# Altium PCB Master.PcbDoc (part 1 of 4)
Units mm, origin at the board's own origin, x right, y up, seen from the top; angles counter-clockwise.
Board outline 150 x 100 mm, 4 copper layers (Top Layer, GND-Layer, PWR-Layer, Bottom Layer), stack 1.586 mm thick; 231 components, 152 nets, 715 pads, 841 vias.
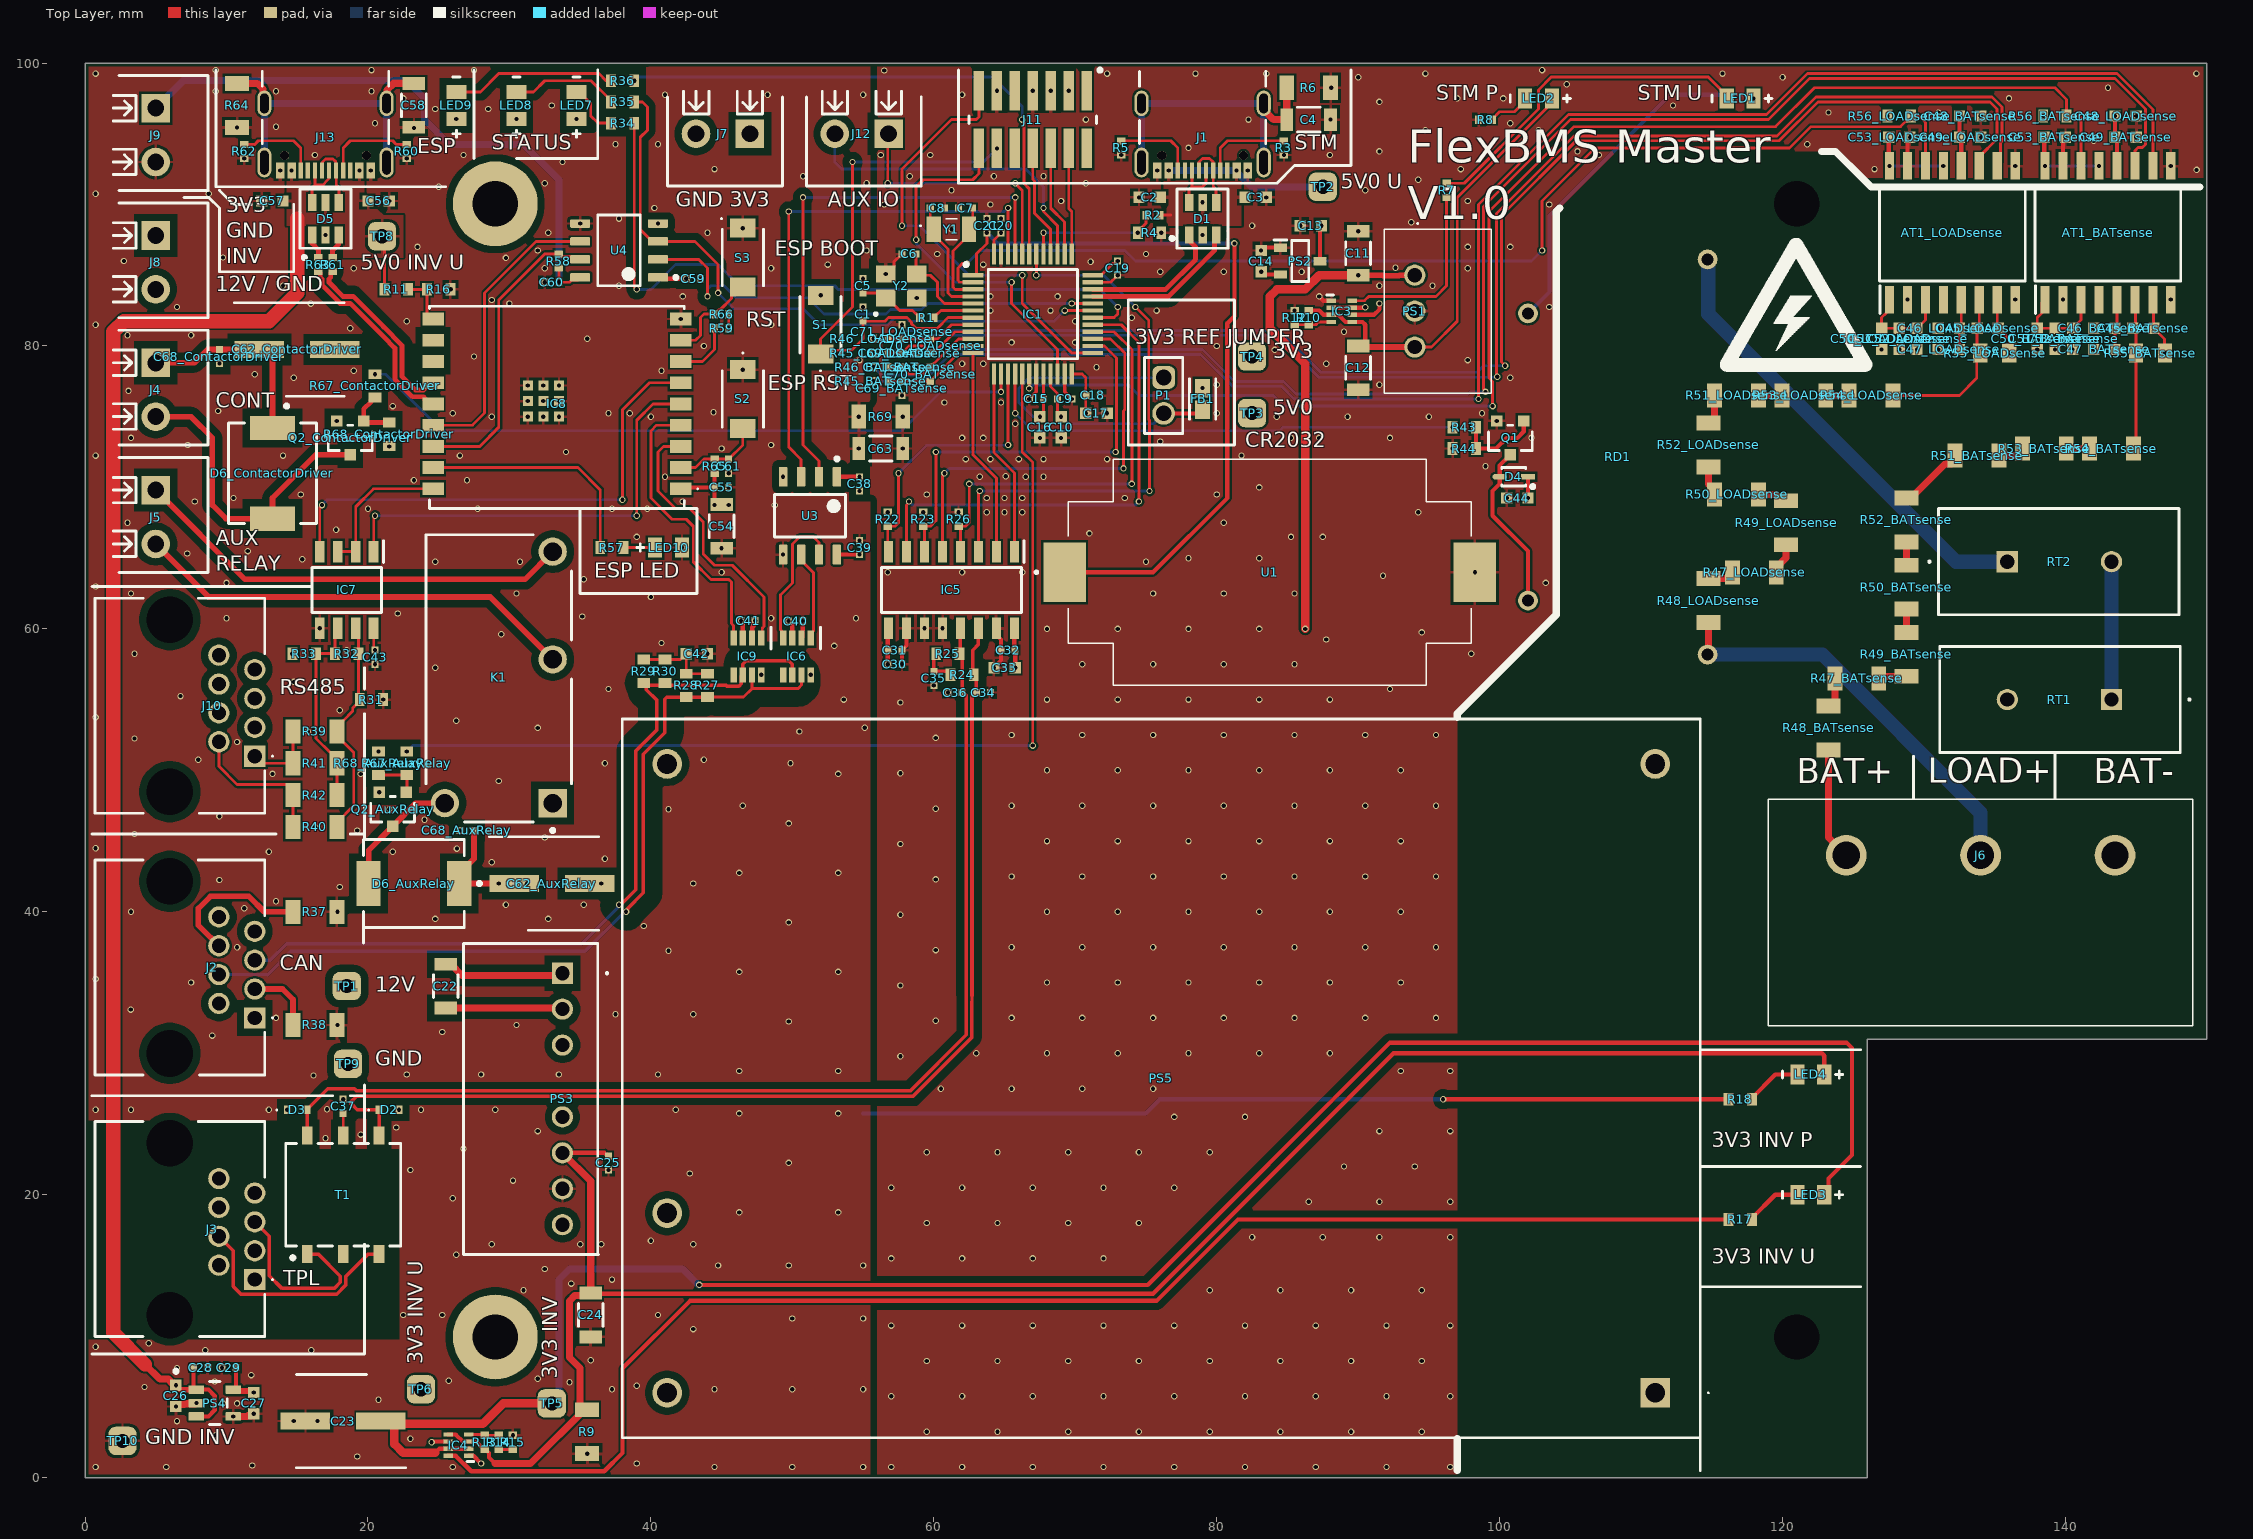
[diagram p0: Top Layer view]
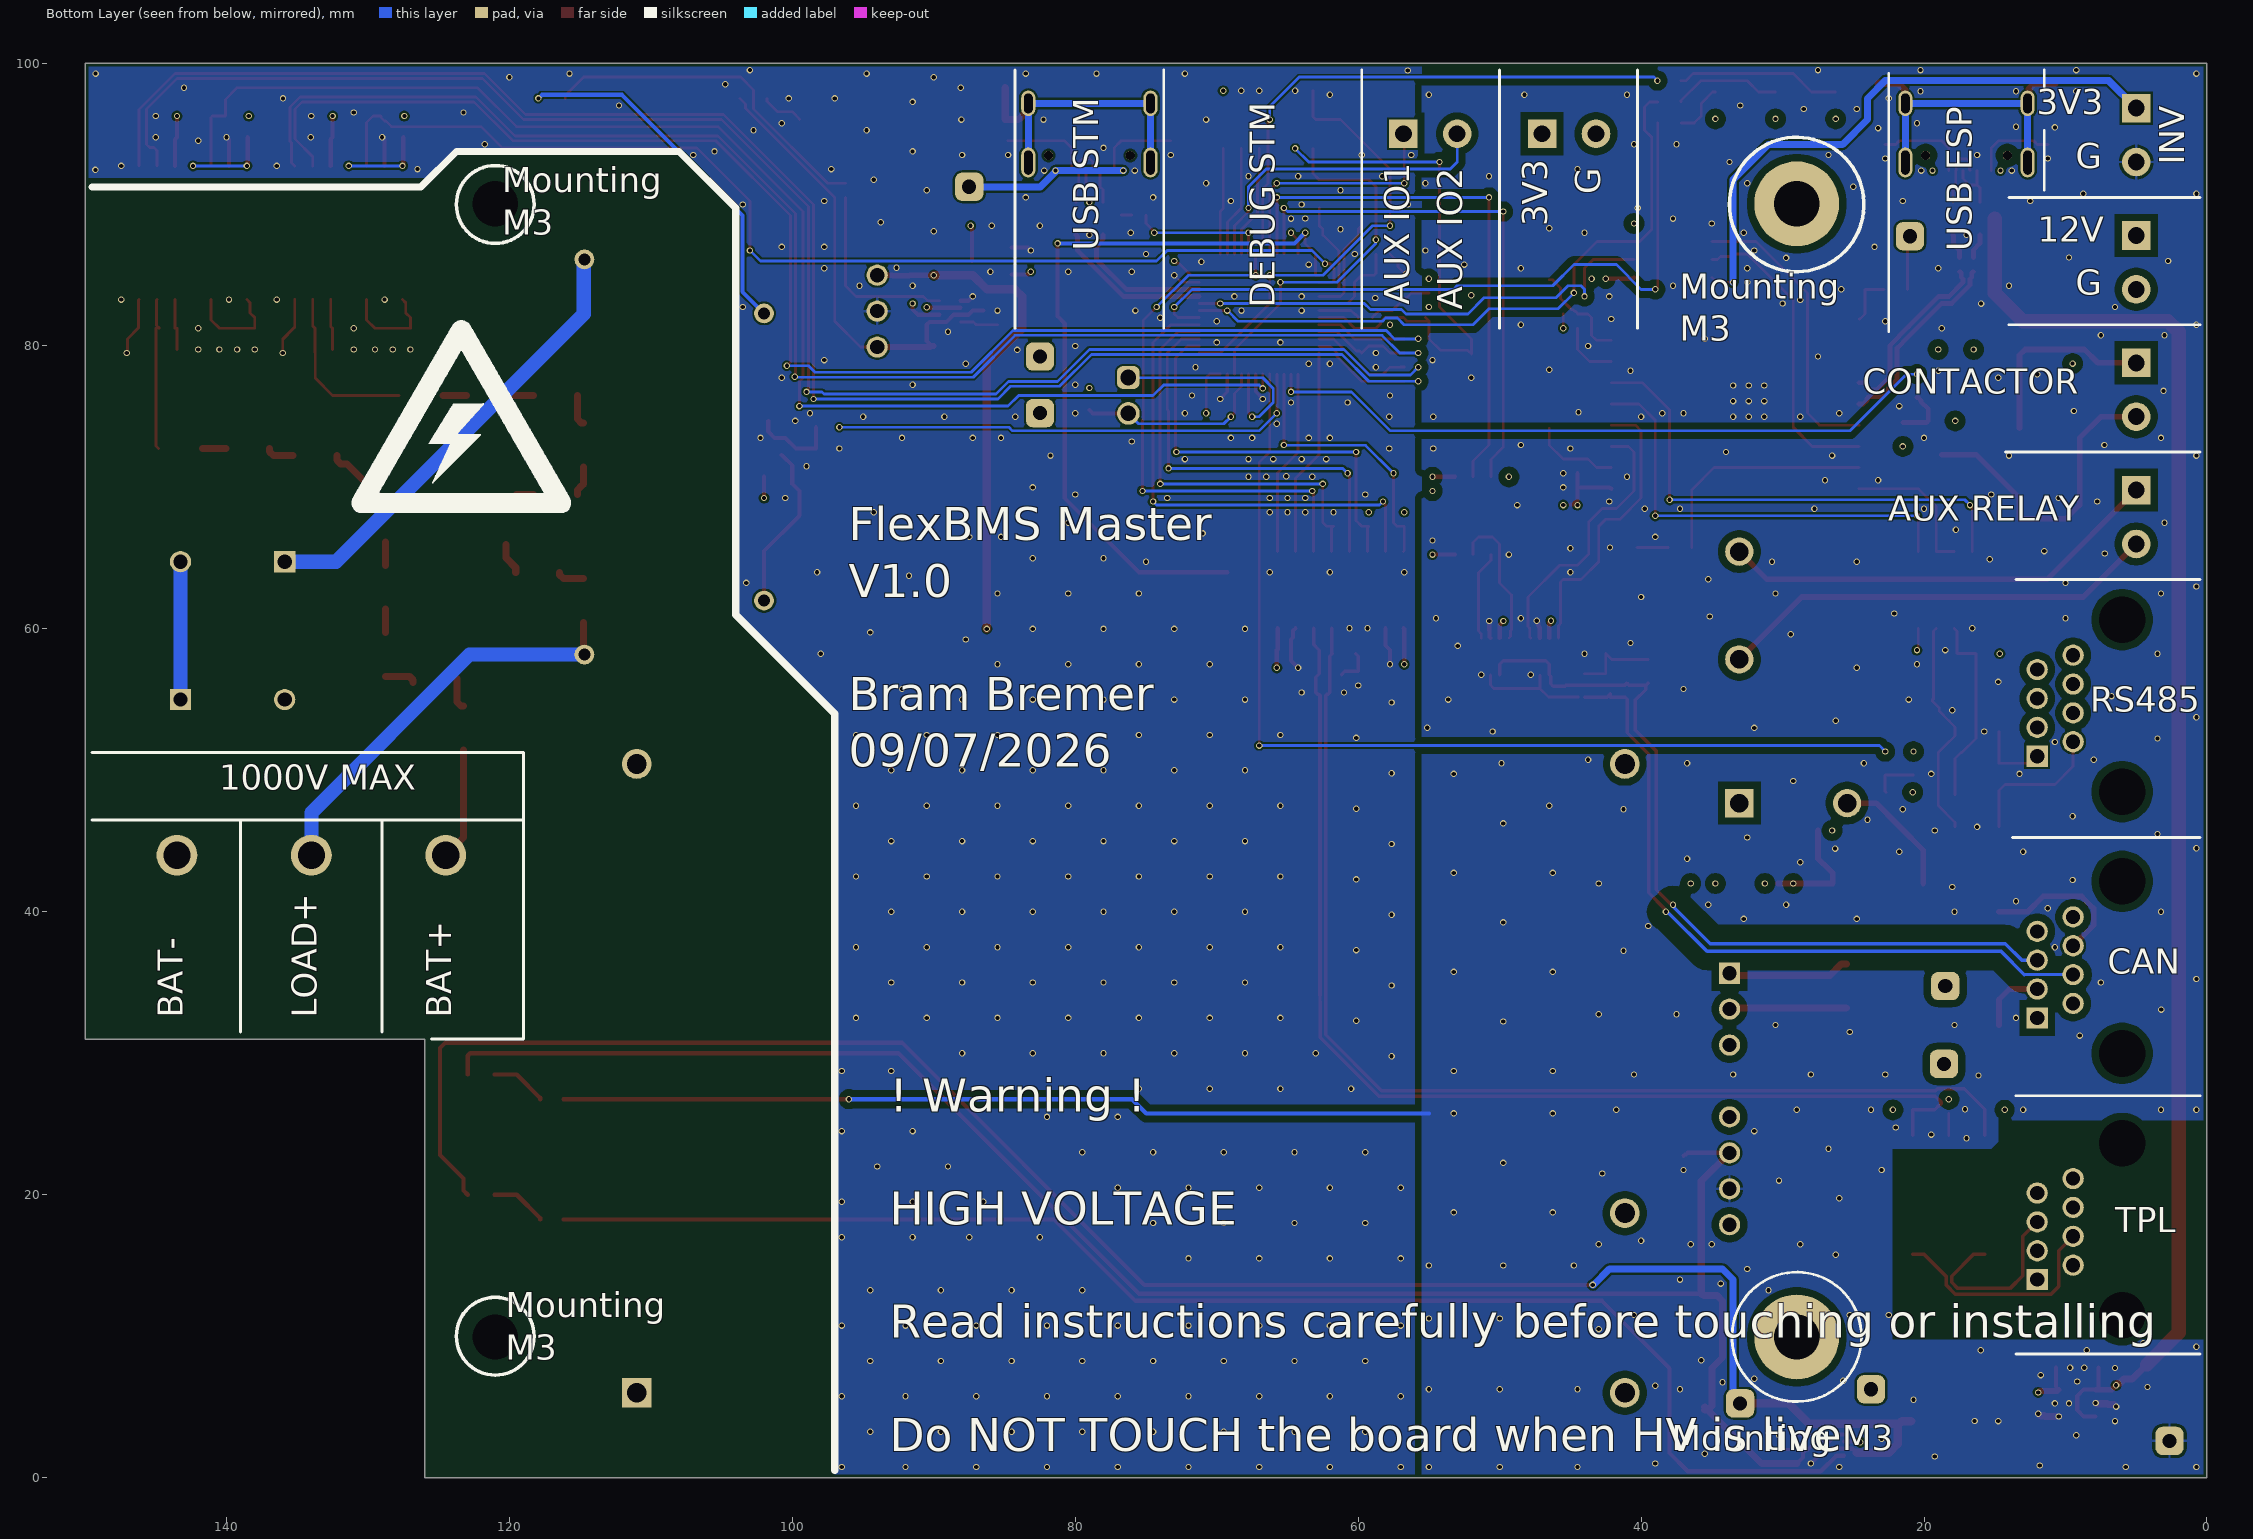
[diagram p1: Bottom Layer view, seen from below]
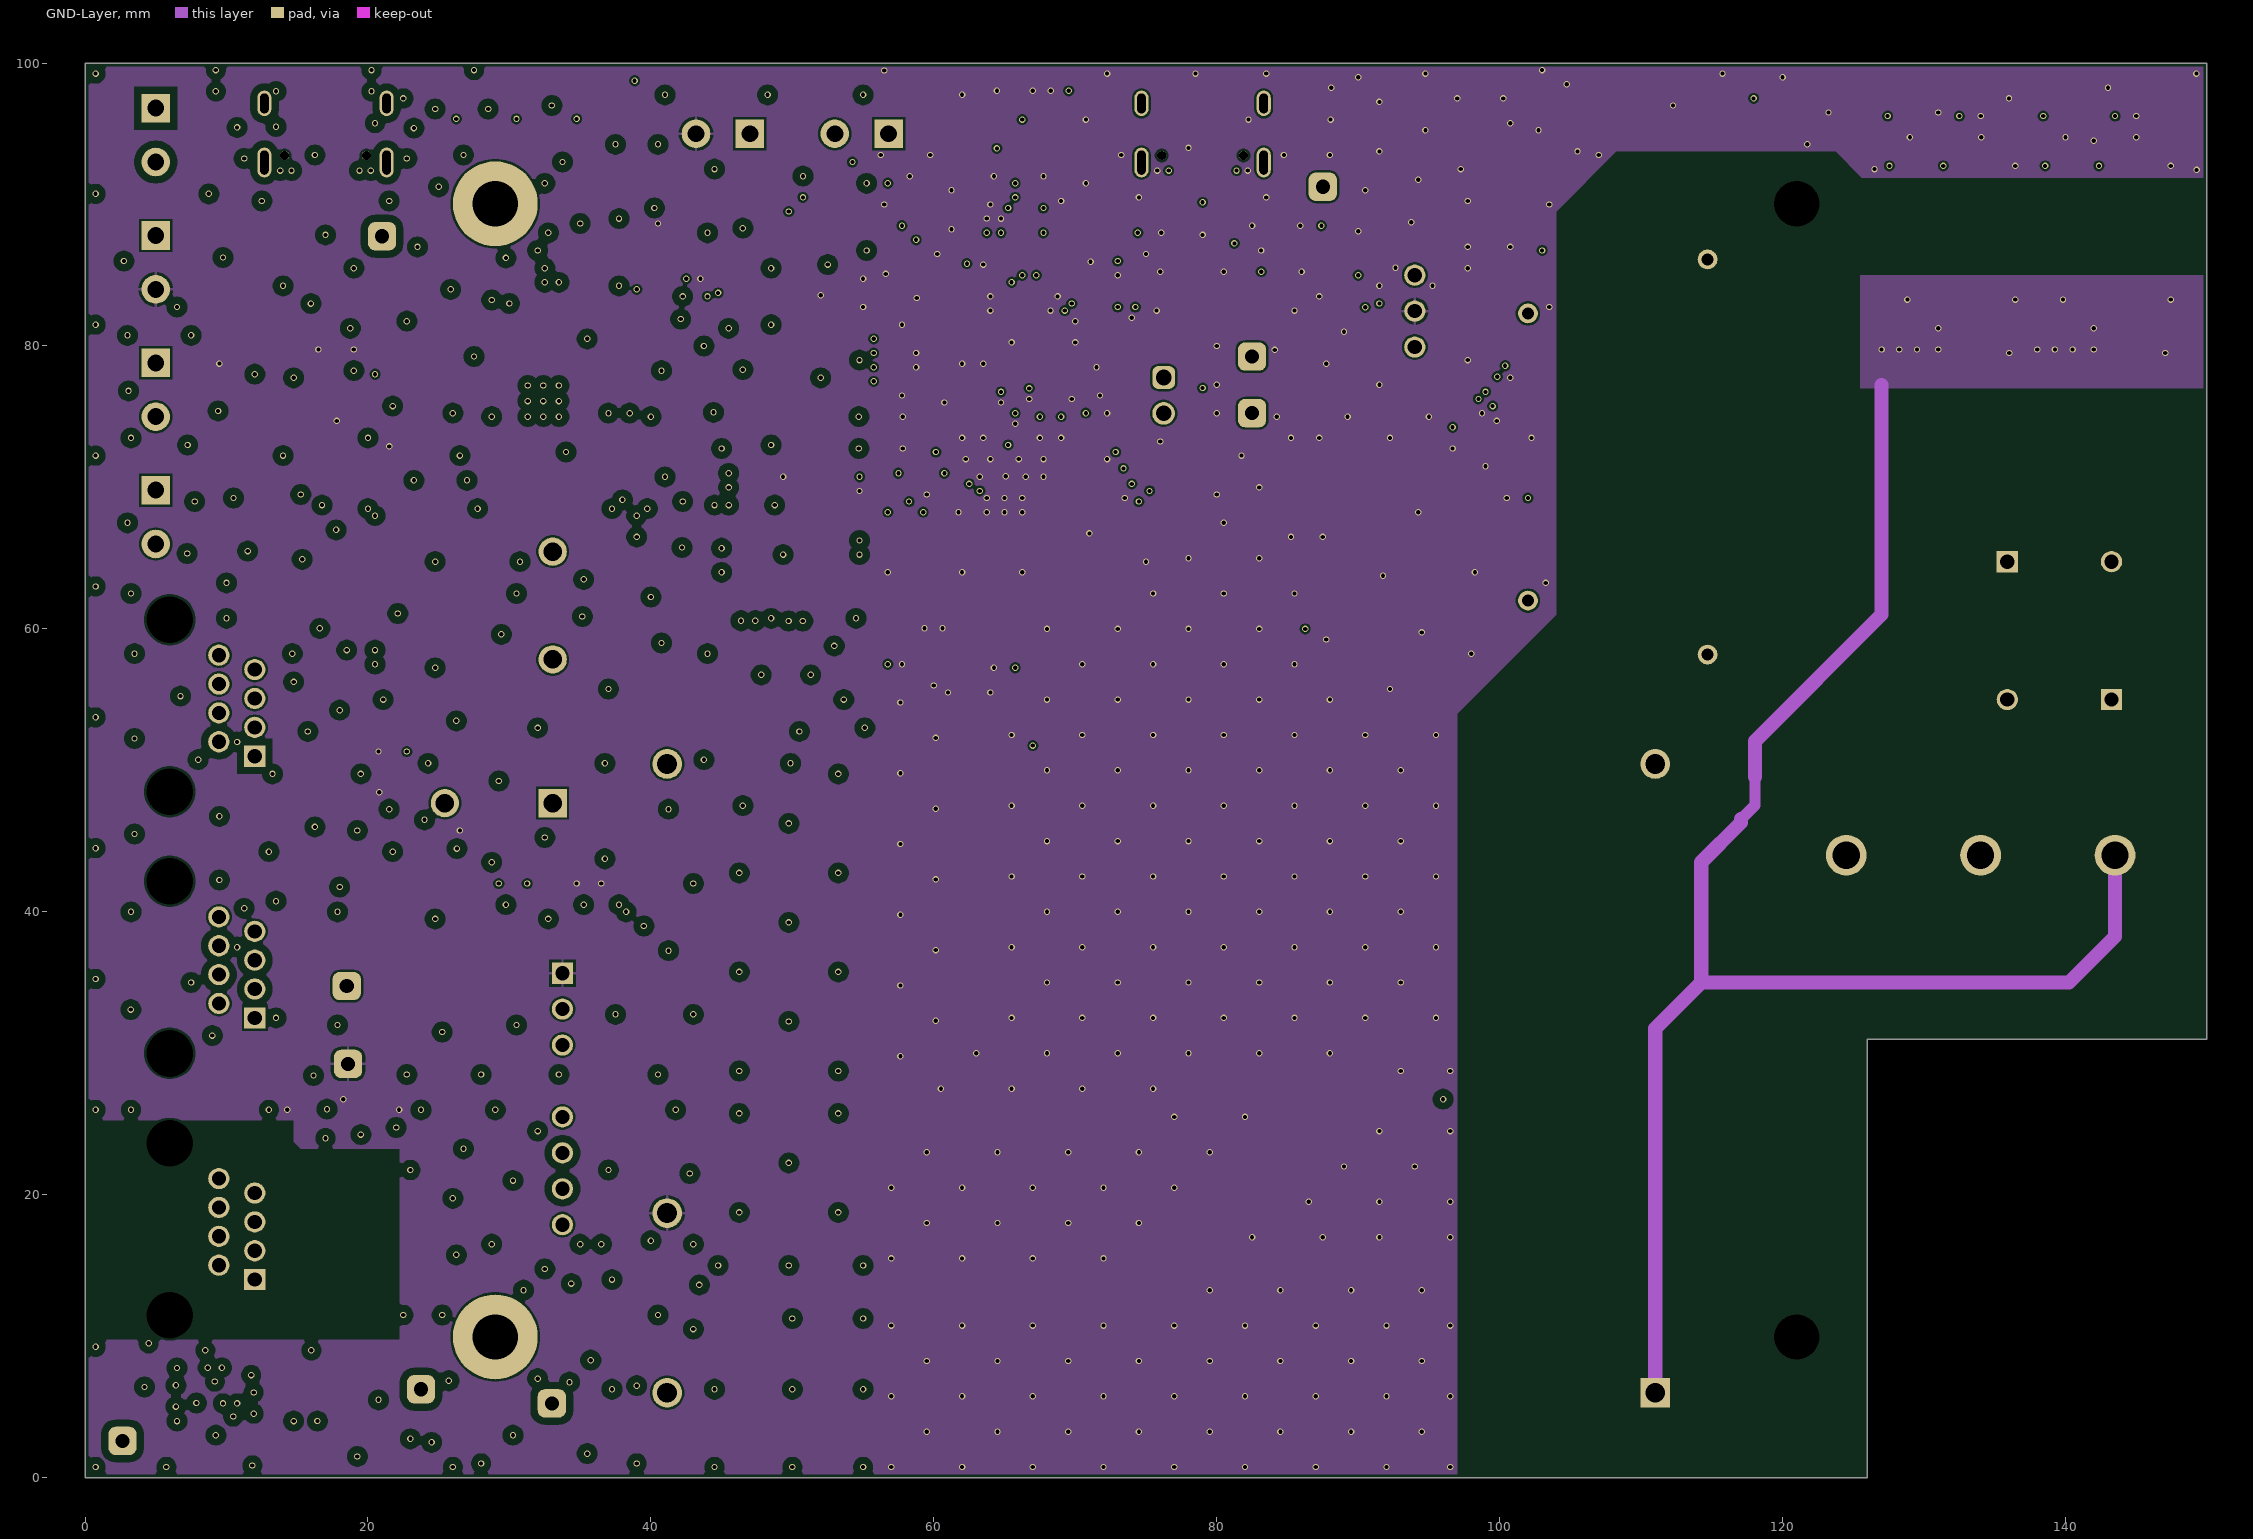
[diagram p2: GND-Layer]
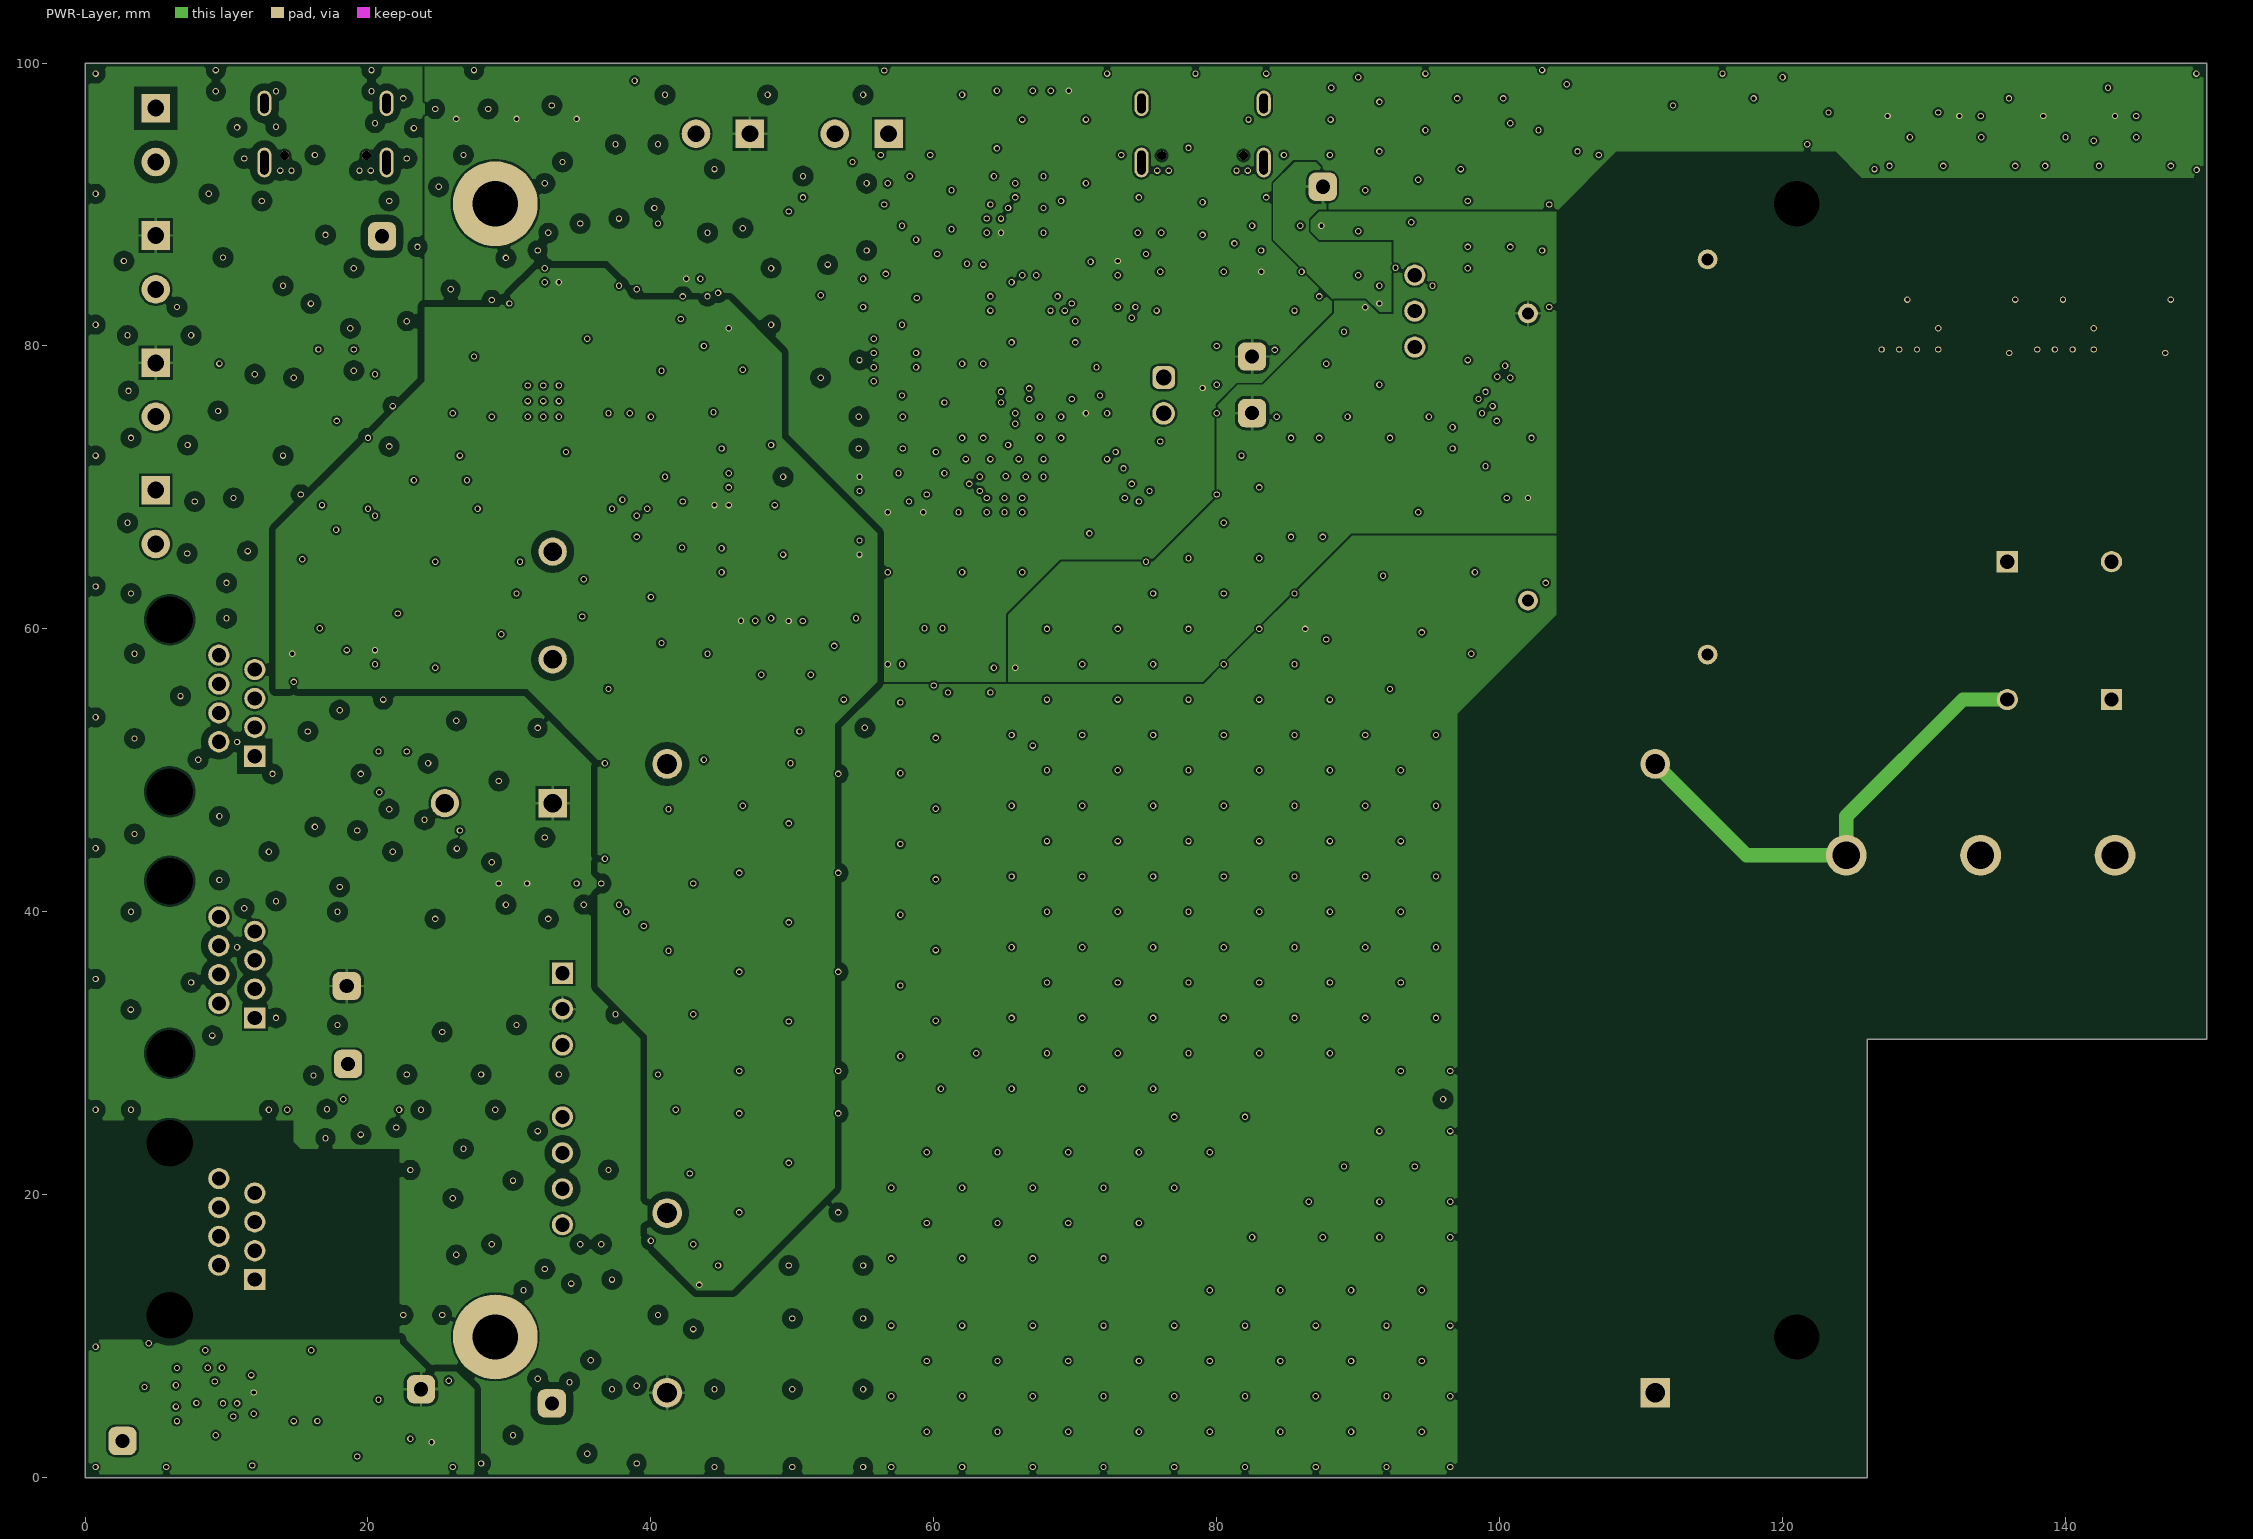
[diagram p3: PWR-Layer]
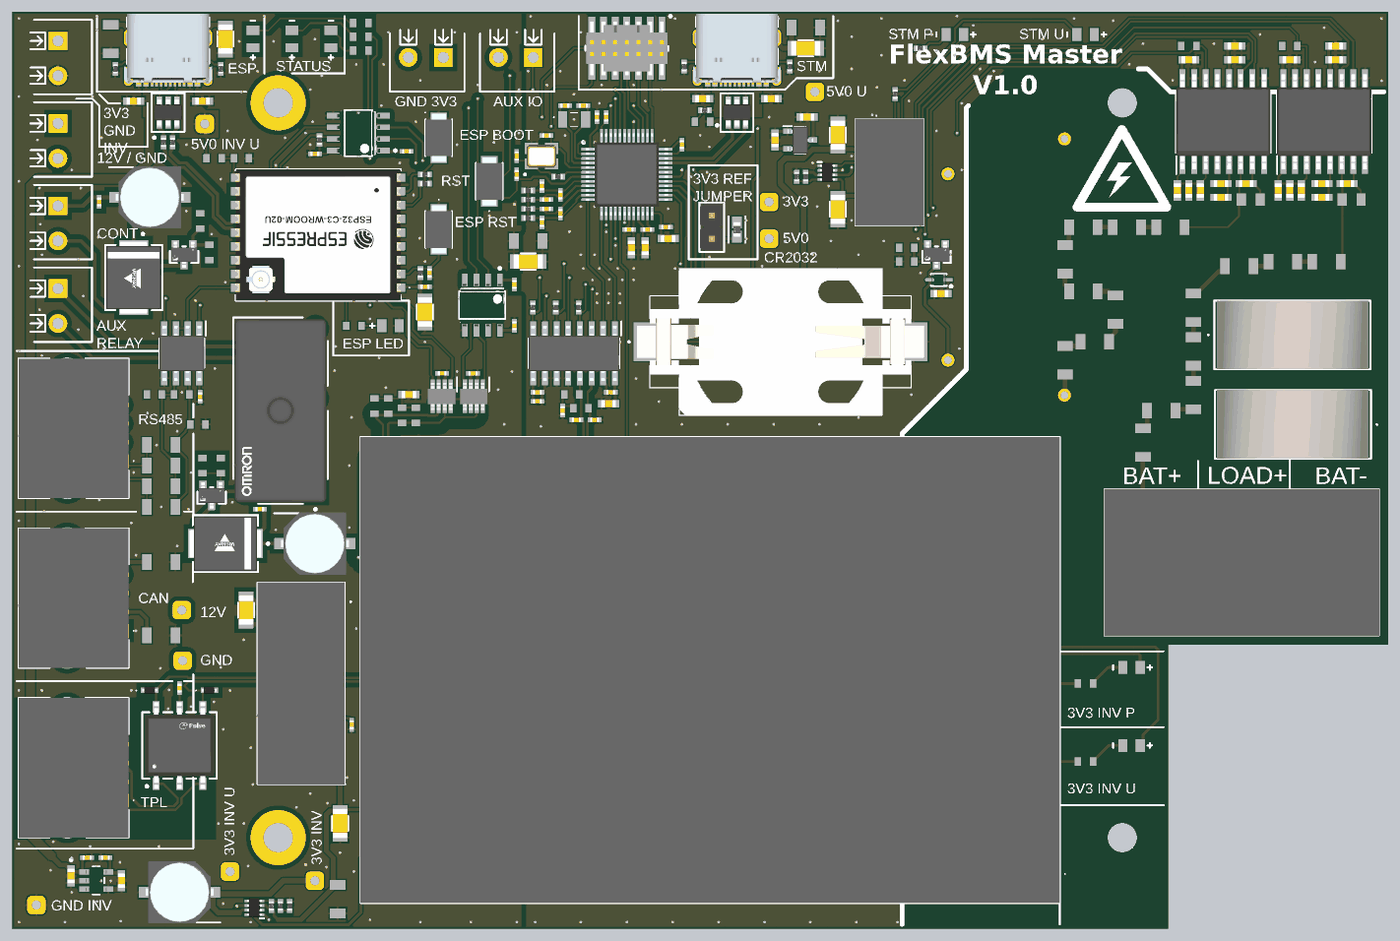
[diagram p6: 3D render of the assembled board from above, using the file's embedded part models]

## Layer stack, top to bottom
Top Solder: solder mask 0.0102, Solder Resist, Dk 3.8
Top Layer: signal copper 0.035
Dielectric1: prepreg 0.2104, FR-4, Dk 4.4
GND-Layer: signal copper 0.0152
Dielectric2: core 1.065, FR-4, Dk 4.6
PWR-Layer: signal copper 0.0152
Dielectric3: prepreg 0.2104, FR-4, Dk 4.4
Bottom Layer: signal copper 0.035
Bottom Solder: solder mask 0.0102, Solder Resist, Dk 3.8

## Board outline
0,0 126,0 126,31 150,31 150,100 0,100

## Design rules (kind name [scope] priority, off if disabled: settings)
BoardOutlineClearance [All] p1: gap=0.25 ignorepadtopadclearanceinfootprint=FALSE except(0: Arc-SplitContinuation Track-SplitContinuation SMDPad-SplitContinuation THPad-SplitContinuation Via-SplitContinuation Fill-SplitContinuation Poly-SplitContinuation Region-SplitContinuation Text-SplitContinuation)
Clearance HV_6/8_D2 [InNetClass('HV_6/8') vs InNetClass('HV')] p1: gap=2 ignorepadtopadclearanceinfootprint=TRUE
Clearance HV_5/8_D2 [InNetClass('HV_5/8') vs InNetClass('HV_7/8')] p2: gap=2 ignorepadtopadclearanceinfootprint=TRUE
Clearance HV_4/8_D2 [InNetClass('HV_4/8') vs InNetClass('HV_6/8')] p3: gap=2 ignorepadtopadclearanceinfootprint=TRUE
Clearance HV_3/8_D2 [InNetClass('HV_3/8') vs InNetClass('HV_5/8')] p4: gap=2 ignorepadtopadclearanceinfootprint=TRUE
Clearance HV_2/8_D2 [InNetClass('HV_2/8') vs InNetClass('HV_4/8')] p5: gap=2 ignorepadtopadclearanceinfootprint=TRUE
Clearance HV_1/8_D2 [InNetClass('HV_1/8') vs InNetClass('HV_3/8')] p6: gap=2 ignorepadtopadclearanceinfootprint=TRUE
Clearance HV_1/8 [InNetClass('HV_1/8') vs InNetClass('HV_2/8')] p7: gap=1 ignorepadtopadclearanceinfootprint=TRUE
Clearance HV_2/8 [InNetClass('HV_2/8') vs InNetClass('HV_3/8')] p8: gap=1 ignorepadtopadclearanceinfootprint=TRUE
Clearance HV_3/8 [InNetClass('HV_3/8') vs InNetClass('HV_4/8')] p9: gap=1 ignorepadtopadclearanceinfootprint=TRUE
Clearance HV_4/8 [InNetClass('HV_4/8') vs InNetClass('HV_5/8')] p10: gap=1 ignorepadtopadclearanceinfootprint=TRUE
Clearance HV_5/8 [InNetClass('HV_5/8') vs InNetClass('HV_6/8')] p11: gap=1 ignorepadtopadclearanceinfootprint=TRUE
Clearance HV_6/8 [InNetClass('HV_6/8') vs InNetClass('HV_7/8')] p12: gap=1 ignorepadtopadclearanceinfootprint=TRUE
Clearance HV_7/8 [InNetClass('HV_7/8') vs InNetClass('HV')] p13: gap=1 ignorepadtopadclearanceinfootprint=TRUE
Clearance HV+ [InNetClass('HV')] p14: gap=5.5 ignorepadtopadclearanceinfootprint=TRUE except(1: Arc-Hole Track-Hole SMDPad-Hole THPad-Hole Via-Hole Fill-Hole Poly-Hole Region-Hole Text-Hole)
Clearance INV [InNetClass('INV') vs Not InNetClass('INV')] p15: gap=0.5 ignorepadtopadclearanceinfootprint=TRUE
Clearance "Schematic Clearance Constraint_2" [InDifferentialPairClass('TPL100')] p16: gap=0.15 ignorepadtopadclearanceinfootprint=FALSE except(0.6: Arc-Fill Arc-Poly Arc-Region Track-Fill Track-Poly Track-Region Fill-Fill Fill-Poly Fill-Region Poly-Poly Poly-Region Region-Region)
Clearance "Schematic Clearance Constraint_1" [InDifferentialPairClass('USB90')] p17: gap=0.15 ignorepadtopadclearanceinfootprint=FALSE except(0.6: Arc-Fill Arc-Poly Arc-Region Track-Fill Track-Poly Track-Region Fill-Fill Fill-Poly Fill-Region Poly-Poly Poly-Region Region-Region)
Clearance "Schematic Clearance Constraint" [InDifferentialPairClass('CAN120')] p18: gap=0.15 ignorepadtopadclearanceinfootprint=FALSE except(1.2: Arc-Fill Arc-Poly Arc-Region Track-Fill Track-Poly Track-Region Fill-Fill Fill-Poly Fill-Region Poly-Poly Poly-Region Region-Region)
Clearance [All] p19: gap=0.15 ignorepadtopadclearanceinfootprint=TRUE
ComponentClearance ComponentClearance_netTie0.4 [HasFootprint('NETTIE_0.4mm')] p1: gap=0.15 collisioncheckmode=3 verticalgap=0.15 showdistances=FALSE
ComponentClearance ComponentClearance_netTie0.2 [HasFootprint('NETTIE_0.2mm')] p2: gap=0.15 collisioncheckmode=3 verticalgap=0.15 showdistances=FALSE
ComponentClearance ComponentClearance_0402 [HasFootprint('FP-RT0402-0_35-MFG')] p3: gap=0.15 collisioncheckmode=3 verticalgap=0.15 showdistances=FALSE
ComponentClearance ComponentClearance_0402cap [HasFootprint('WCAP-CSGP_0402_L1W0.5H0.5')] p4: gap=0.15 collisioncheckmode=3 verticalgap=0.15 showdistances=FALSE
ComponentClearance ComponentClearance_default [All] p5: gap=0.25 collisioncheckmode=3 verticalgap=0.25 showdistances=FALSE
DiffPairsRouting USB90 [InDifferentialPairClass('USB90')] p1: maxlimit=0.2 minlimit=0.15 mostfreqgap=0.15 toplayer_minwidth=0.3 toplayer_maxwidth=0.4 toplayer_prefwidth=0.341 midlayer1_minwidth=0.381 midlayer1_maxwidth=0.381 midlayer1_prefwidth=0.381 midlayer2_minwidth=0.381 midlayer2_maxwidth=0.381 midlayer2_prefwidth=0.381 bottomlayer_minwidth=0.3 bottomlayer_maxwidth=0.4 bottomlayer_prefwidth=0.341 impedanceprofiledriven=TRUE maxuncoupledlength=12.7
DiffPairsRouting TPL100 [InDifferentialPairClass('TPL100')] p2: maxlimit=0.2 minlimit=0.15 mostfreqgap=0.15 toplayer_minwidth=0.2 toplayer_maxwidth=0.3 toplayer_prefwidth=0.247 midlayer1_minwidth=0.381 midlayer1_maxwidth=0.381 midlayer1_prefwidth=0.381 midlayer2_minwidth=0.381 midlayer2_maxwidth=0.381 midlayer2_prefwidth=0.381 bottomlayer_minwidth=0.2 bottomlayer_maxwidth=0.3 bottomlayer_prefwidth=0.247 impedanceprofiledriven=TRUE maxuncoupledlength=12.7
DiffPairsRouting CAN120 [InDifferentialPairClass('CAN120')] p3: maxlimit=0.4 minlimit=0.2 mostfreqgap=0.3 toplayer_minwidth=0.2 toplayer_maxwidth=0.3 toplayer_prefwidth=0.248 midlayer1_minwidth=0.381 midlayer1_maxwidth=0.381 midlayer1_prefwidth=0.381 midlayer2_minwidth=0.381 midlayer2_maxwidth=0.381 midlayer2_prefwidth=0.381 bottomlayer_minwidth=0.2 bottomlayer_maxwidth=0.3 bottomlayer_prefwidth=0.248 impedanceprofiledriven=TRUE maxuncoupledlength=12.7
Height [All] p1: minheight=0 maxheight=999 prefheight=1
HoleSize HoleSize-PTH [All] p1: absolutevalues=TRUE maxlimit=8 minlimit=0.25 maxpercent=80.000 minpercent=20.000
HoleToHoleClearance [All] p1: gap=0.35 allowstackedmicrovias=TRUE
MatchedLengths DiffPair_USB90MatchedLengths [InDifferentialPairClass('USB90')] p1: tolerance=25.4 checknetsindiffpair=TRUE checkdiffpairvsdiffpair=FALSE checkxsignals=FALSE checkothers=FALSE
MatchedLengths DiffPair_TPL100MatchedLengths [InDifferentialPairClass('TPL100')] p2: tolerance=25.4 checknetsindiffpair=TRUE checkdiffpairvsdiffpair=FALSE checkxsignals=FALSE checkothers=FALSE
MatchedLengths DiffPair_CAN120MatchedLengths [InDifferentialPairClass('CAN120')] p3: tolerance=25.4 checknetsindiffpair=TRUE checkdiffpairvsdiffpair=FALSE checkxsignals=FALSE checkothers=FALSE
MinimumAnnularRing "MinimumAnnularRing - Via" [IsVia] p1: minimumring=0.07
MinimumAnnularRing "MinimumAnnularRing - PTH" [Not IsVia] p2: minimumring=0.2
MinimumSolderMaskSliver [All] p1: minsoldermaskwidth=0.1
PlaneClearance PlaneClearance_HV- [InNet('HV_BAT-')] p1: clearance=5.5
PlaneClearance PlaneClearance_HV [InNetClass('HV')] p2: clearance=5.5
PlaneClearance PlaneClearance-IPI [All] p3: clearance=0.25
PlaneConnect [All] p1: pad.planeconnectstyle=Relief pad.reliefexpansion=0.25 pad.reliefentries=4 pad.reliefconductorwidth=0.3 pad.reliefairgap=0.25 via.planeconnectstyle=Direct via.reliefexpansion=0.175 via.reliefentries=4 via.reliefconductorwidth=0.2 via.reliefairgap=0.25
PolygonConnect PolygonConnect-xTW [InNet('+12')] p1: thpad.connectstyle=Relief thpad.reliefconductorwidth=0.5 thpad.reliefentries=4 thpad.polygonreliefangle="90 Angle" thpad.airgapwidth=0.2 smdpad.connectstyle=Relief smdpad.reliefconductorwidth=0.5 smdpad.reliefentries=4 smdpad.polygonreliefangle="90 Angle" smdpad.airgapwidth=0.2 via.connectstyle=Direct via.reliefconductorwidth=0.2 via.reliefentries=4 via.polygonreliefangle="90 Angle" via.airgapwidth=0.2
PolygonConnect PolygonConnect-xTW_1 [All] p2: thpad.connectstyle=Relief thpad.reliefconductorwidth=0.2 thpad.reliefentries=4 thpad.polygonreliefangle="90 Angle" thpad.airgapwidth=0.2 smdpad.connectstyle=Relief smdpad.reliefconductorwidth=0.2 smdpad.reliefentries=4 smdpad.polygonreliefangle="90 Angle" smdpad.airgapwidth=0.2 via.connectstyle=Direct via.reliefconductorwidth=0.2 via.reliefentries=4 via.polygonreliefangle="90 Angle" via.airgapwidth=0.2
RoutingCorners [All] p1: cornerstyle=45-Degree minsetback=2.5 maxsetback=2.5
RoutingVias [All] p1: holewidth=0.3 width=0.7 viastyle="Through Hole" minholewidth=0.3 minwidth=0.7 maxholewidth=0.3 maxwidth=0.7 useviatemplates=TRUE viatemplateguid#1={9CE1B57B-0AEF-491C-8DAC-2427A11A18E7} viatemplatename#1=v45h30m0mx0
SMDEntry [All] p1: side=TRUE corner=TRUE anyangle=FALSE
SMDNeckDown SMDNeckDown_1 [All] p1: percent=120.000
SMDToCorner [All] p1: distance=0
SilkToSilkClearance [All] p1: silktosilkclearance=0
SilkToSolderMaskClearance SilkscreenOverComponentPads [IsPad] p1: minsilkscreentomaskgap=0.15 clearancetoexposedcopper=TRUE
SolderMaskExpansion [All] p1: expansion=0 istentingtop=FALSE
SupplyNets "Schematic Supply Nets_8" [InNet('HV_BAT-')] p1: voltage=0.000
SupplyNets "Schematic Supply Nets_7" [InNet('GND')] p2: voltage=0.000
SupplyNets "Schematic Supply Nets_3" [InNet('p12v0')] p3: voltage=0.000
SupplyNets "Schematic Supply Nets_22" [InNet('HV_L+')] p4: voltage=0.000
SupplyNets "Schematic Supply Nets_21" [InNet('p3v3_INV')] p5: voltage=0.000
SupplyNets "Schematic Supply Nets_20" [InNet('p5v0_INV_USB')] p6: voltage=0.000
SupplyNets "Schematic Supply Nets_19" [InNet('p3v3_INV_PS')] p7: voltage=0.000
SupplyNets "Schematic Supply Nets_15" [InNet('p3v3_INV_USB')] p8: voltage=0.000
SupplyNets "Schematic Supply Nets_14" [InNet('HV_BAT+')] p9: voltage=0.000
SupplyNets "Schematic Supply Nets_13" [InNet('GND_INV')] p10: voltage=0.000
SupplyNets "Schematic Supply Nets_12" [InNet('p5v0_USB')] p11: voltage=0.000
SupplyNets "Schematic Supply Nets_9" [InNet('p3v3')] p12: voltage=0.000
SupplyNets "Schematic Supply Nets_6" [InNet('p3v3A')] p13: voltage=0.000
SupplyNets "Schematic Supply Nets_5" [InNet('p5v0')] p14: voltage=0.000
SupplyNets "Schematic Supply Nets_4" [InNet('p5v0_PS')] p15: voltage=0.000
SupplyNets "Schematic Supply Nets_2" [InNet('p3v3Ref')] p16: voltage=0.000
SupplyNets "Schematic Supply Nets" [InNet('pBat')] p17: voltage=0.000
UnRoutedNet [All] p1: checkbadconnections=TRUE
Width [All] p1: maxlimit=2 minlimit=0.2 preferedwidth=0.4
18 further rules are at their usual default settings.

## Classes and differential pairs
net class INV: A A8 B B8 CAN_CON_PIN3 CAN_CON_PIN6 CAN_ESP32_RX CAN_ESP32_TX CAN_HI CAN_LO CAN_STM_INV_RX CAN_STM_INV_TX EN ESP_VBUS_SENSE GND_INV IO2/STRAP/UART_ESP_TX IO8/STRAP IO9/BOOT NetC42_1 NetC58_1 NetD5_1 NetD5_3 NetD5_4 NetD5_6 NetIC8_10 NetIC8_11 NetIC8_12 NetJ2_1 NetJ2_2 NetJ2_7 NetJ2_8 NetJ10_3 NetJ10_4 NetJ10_5 NetJ10_6 NetJ10_7 NetJ10_8 NetJ13_A5 NetJ13_A8 NetJ13_B5 NetJ13_B8 NetLED3_2 NetLED4_2 NetLED10_1 NetR14_1 p3v3_INV p3v3_INV_PS p3v3_INV_USB p5v0_INV_USB PR1_3V3_INV RS485_A RS485_B RS485_DI RS485_EN RS485_RO SHDN1 SHDN2 ST_INV_3V3 UART_ESP_RX USB_ESP32_N USB_ESP32_P USR_LED
net class HV_7/8: NetR47_BATsense_1 NetR47_LOADsense_1
net class HV_6/8: NetR47_BATsense_2 NetR47_LOADsense_2
net class HV_5/8: NetR49_BATsense_1 NetR49_LOADsense_1
net class HV_4/8: NetR50_BATsense_1 NetR50_LOADsense_1
net class HV_3/8: NetR51_BATsense_1 NetR51_LOADsense_1
net class HV_2/8: NetR51_BATsense_2 NetR51_LOADsense_2
net class HV_1/8: NetR53_BATsense_1 NetR53_LOADsense_1
net class HV: HV_BAT+ HV_L+ NetRD1_2 NetRT1_1
differential pair class USB90: USB_ESP32 USB_STM32
channel class RelayDriver: AuxRelay ContactorDriver
channel class HVsense: BATsense LOADsense
component class LOADsense: AT1_LOADsense C45_LOADsense C46_LOADsense C47_LOADsense C48_LOADsense C49_LOADsense C50_LOADsense C51_LOADsense C52_LOADsense C53_LOADsense C69_LOADsense C70_LOADsense C71_LOADsense R45_LOADsense R46_LOADsense R47_LOADsense R48_LOADsense R49_LOADsense R50_LOADsense R51_LOADsense R52_LOADsense R53_LOADsense R54_LOADsense R55_LOADsense R56_LOADsense
component class ESP32: C54 C55 C56 C57 C58 C59 C60 C61 D5 IC8 J13 LED10 R11 R16 R57 R58 R59 R60 R61 R62 R63 R64 R65 R66 S2 S3 U4
component class ContactorDriver: C62_ContactorDriver C68_ContactorDriver D6_ContactorDriver Q2_ContactorDriver R67_ContactorDriver R68_ContactorDriver
component class BATsense: AT1_BATsense C45_BATsense C46_BATsense C47_BATsense C48_BATsense C49_BATsense C50_BATsense C51_BATsense C52_BATsense C53_BATsense C69_BATsense C70_BATsense C71_BATsense R45_BATsense R46_BATsense R47_BATsense R48_BATsense R49_BATsense R50_BATsense R51_BATsense R52_BATsense R53_BATsense R54_BATsense R55_BATsense R56_BATsense
component class AuxRelay: C62_AuxRelay C68_AuxRelay D6_AuxRelay Q2_AuxRelay R67_AuxRelay R68_AuxRelay
component class TPL_Trans: C30 C31 C32 C33 C34 C35 C36 C37 C38 C39 C40 C41 C43 C59 C60 T1
component class HV: RT1 RT2
component class Designator: C44 D4 PS5 Q1 R43 R44 RD1 RT1 RT2
differential pair class TPL100: RDTX TPL
component class Transceivers: C30 C31 C32 C33 C34 C35 C36 C37 C38 C39 C40 C41 C42 C43 D2 D3 IC5 IC6 IC7 IC9 R22 R23 R24 R25 R26 R27 R28 R29 R30 R31 R32 R33 T1 U3
component class STM32: C1 C2 C3 C4 C5 C6 C7 C8 D1 IC1 J1 R1 R2 R3 R4 R5 R6 S1 Y1 Y2
component class Power: C9 C10 C11 C12 C13 C14 C15 C16 C17 C18 C19 C20 C21 C22 C23 C24 C25 C26 C27 C28 C29 C63 FB1 IC3 IC4 LED1 LED2 LED3 LED4 P1 PS1 PS2 PS3 PS4 R7 R8 R9 R10 R12 R13 R14 R15 R17 R18 R69 TP1 TP2 TP3 TP4 TP5 TP6 TP8 TP9 TP10 U1
component class Peripherals: K1 LED7 LED8 LED9 R34 R35 R36
component class Connectors: J2 J3 J4 J5 J6 J7 J8 J9 J10 J11 J12 R37 R38 R39 R40 R41 R42
differential pair class CAN120: CAN
differential pair VU_LOADsense: +VU_LOADsense_P -VU_LOADsense_N
differential pair VU_BATsense: +VU_BATsense_P -VU_BATsense_N
differential pair V_LOADsense: +V_LOADsense_P -V_LOADsense_N
differential pair V_BATsense: +V_BATsense_P -V_BATsense_N
differential pair USB_STM32: +USB_STM32_P -USB_STM32_N
differential pair USB_ESP32: +USB_ESP32_P -USB_ESP32_N
differential pair RDTX: +RDTX_P -RDTX_N
differential pair TPL: +TPL_P -TPL_N
differential pair CAN: +CAN_HI -CAN_LO

## Components (designator, comment, footprint, x,y, rotation, side; value= is the part's Value field where it differs from the comment)
AT1_BATsense "AMC3330QDWERQ1" SOIC127P1030X265-16N 143,88 r90 top (schematic designator AT1)
AT1_LOADsense "AMC3330QDWERQ1" SOIC127P1030X265-16N 132,88 r90 top (schematic designator AT1)
C1 "CAP 0402 100nF X7R" WCAP-CSGP_0402_L1W0.5H0.5 55,82.25 r270 top value=100nF
C2 "CAP 0603 2.2uF X7R" WCAP-CSGP_0603_L1.6W0.8H0.8_Reflow 75.25,90.5 r0 top value=2.2uF
C3 "CAP 0603 2.2uF X7R" WCAP-CSGP_0603_L1.6W0.8H0.8_Reflow 82.75,90.5 r180 top value=2.2uF
C4 "CAP 1206 1nF X7R" WCAP-CSGP_1206_L3.2W1.6H1.15 86.5,96 r0 top value=1nF
C5 "CAP 0402 10pF X7R" WCAP-CSGP_0402_L1W0.5H0.5 55,84.25 r270 top value=10pF
C6 "CAP 0402 10pF X7R" WCAP-CSGP_0402_L1W0.5H0.5 58.25,86.5 r0 top value=10pF
C7 "CAP 0402 18pF X7R" WCAP-CSGP_0402_L1W0.5H0.5 62.25,89.75 r0 top value=18pF
C8 "CAP 0402 18pF X7R" WCAP-CSGP_0402_L1W0.5H0.5 60.25,89.75 r180 top value=18pF
C9 "CAP 0402 100nF X7R" WCAP-CSGP_0402_L1W0.5H0.5 69.25,76.25 r180 top value=100nF
C10 "CAP 0603 1uF X7R" WCAP-CSGP_0603_L1.6W0.8H0.8_Reflow 69,74.25 r270 top value=1uF
C11 "CAP 1206 22uF X7R" WCAP-CSGP_1206_L3.2W1.6H1.15 90,86.55 r270 top value=22uF
C12 "CAP 1206 22uF X7R" WCAP-CSGP_1206_L3.2W1.6H1.15 90,78.45 r90 top value=22uF
C13 "CAP 0603 1uF X7R" WCAP-CSGP_0603_L1.6W0.8H0.8_Reflow 86.65,88.5 r0 top value=1uF
C14 "CAP 0603 1uF X7R" WCAP-CSGP_0603_L1.6W0.8H0.8_Reflow 83.15,86 r270 top value=1uF
C15 "CAP 0402 100nF X7R" WCAP-CSGP_0402_L1W0.5H0.5 67.25,76.25 r0 top value=100nF
C16 "CAP 0603 1uF X7R" WCAP-CSGP_0603_L1.6W0.8H0.8_Reflow 67.5,74.25 r270 top value=1uF
C17 "CAP 0603 4.7uF X7R" WCAP-CSGP_0603_L1.6W0.8H0.8_Reflow 71.5,75.25 r0 top value=4.7uF
C18 "CAP 0402 100nF X7R" WCAP-CSGP_0402_L1W0.5H0.5 71.25,76.5 r180 top value=100nF
C19 "CAP 0402 100nF X7R" WCAP-CSGP_0402_L1W0.5H0.5 73,85.5 r90 top value=100nF
C20 "CAP 0402 100nF X7R" WCAP-CSGP_0402_L1W0.5H0.5 64.75,88.5 r270 top value=100nF
C21 "CAP 0402 100nF X7R" WCAP-CSGP_0402_L1W0.5H0.5 63.75,88.5 r270 top value=100nF
C22 "CAP 1206 22uF X7R" WCAP-CSGP_1206_L3.2W1.6H1.15 25.5,34.75 r270 top value=22uF
C23 "VEJ101M1ETR-0607" CAPAE660X800N 18.25,4 r180 top value=100uF
C24 "CAP 1206 22uF X7R" WCAP-CSGP_1206_L3.2W1.6H1.15 35.75,11.5 r90 top value=22uF
C25 "CAP 0402 100nF X7R" WCAP-CSGP_0402_L1W0.5H0.5 37,22.25 r90 top value=100nF
C26 "CAP 0603 4.7uF X5R" WCAP-CSGP_0603_L1.6W0.8H0.8_Reflow 6.425,5.775 r270 top value=4.7uF
C27 "CAP 0603 4.7uF X5R" WCAP-CSGP_0603_L1.6W0.8H0.8_Reflow 11.925,5.275 r270 top value=4.7uF
C28 "CAP 0402 100nF X7R" WCAP-CSGP_0402_L1W0.5H0.5 8.175,7.775 r180 top value=100nF
C29 "CAP 0402 100nF X7R" WCAP-CSGP_0402_L1W0.5H0.5 10.175,7.775 r0 top value=100nF
C30 "CAP 0402 100nF X7R" WCAP-CSGP_0402_L1W0.5H0.5 57.25,57.5 r180 top value=100nF
C31 "CAP 0402 1nF X7R" WCAP-CSGP_0402_L1W0.5H0.5 57.25,58.5 r180 top value=1nF
C32 "CAP 0402 100nF X7R" WCAP-CSGP_0402_L1W0.5H0.5 65.25,58.5 r0 top value=100nF
C33 "CAP 0603 2.2uF X7R" WCAP-CSGP_0603_L1.6W0.8H0.8_Reflow 65,57.25 r0 top value=2.2uF
C34 "CAP 0402 68pF X7R" WCAP-CSGP_0402_L1W0.5H0.5 63.5,55.5 r0 top value=68pF
C35 "CAP 0402 4.7nF X7R" WCAP-CSGP_0402_L1W0.5H0.5 60,56.5 r90 top value=4.7nF
C36 "CAP 0402 68pF X7R" WCAP-CSGP_0402_L1W0.5H0.5 61.5,55.5 r0 top value=68pF
C37 "CAP 0402 100pF X7R" WCAP-CSGP_0402_L1W0.5H0.5 18.25,26.25 r270 top value=100pF
C38 "CAP 0402 100nF X7R" WCAP-CSGP_0402_L1W0.5H0.5 54.75,70.25 r90 top value=100nF
C39 "CAP 0402 100nF X7R" WCAP-CSGP_0402_L1W0.5H0.5 54.75,65.75 r270 top value=100nF
C40 "CAP 0402 100nF X7R" WCAP-CSGP_0402_L1W0.5H0.5 50.237,60.555 r180 top value=100nF
C41 "CAP 0402 100nF X7R" WCAP-CSGP_0402_L1W0.5H0.5 46.875,60.574 r180 top value=100nF
C42 "CAP 0603 47n X7R" WCAP-CSGP_0603_L1.6W0.8H0.8_Reflow 43.25,58.25 r0 top value=47n
C43 "CAP 0402 100nF X7R" WCAP-CSGP_0402_L1W0.5H0.5 20.5,58 r90 top value=100nF
C44 "CAP 0603 100nF X7R" WCAP-CSGP_0603_L1.6W0.8H0.8_Reflow 101.25,69.25 r180 top value=100nF
C45_BATsense "CAP 0603 10nF X7R" WCAP-CSGP_0603_L1.6W0.8H0.8_Reflow 145.5,81.25 r180 top value=10nF (schematic designator C45)
C45_LOADsense "CAP 0603 10nF X7R" WCAP-CSGP_0603_L1.6W0.8H0.8_Reflow 134.5,81.25 r180 top value=10nF (schematic designator C45)
C46_BATsense "CAP 0603 100nF X7R" WCAP-CSGP_0603_L1.6W0.8H0.8_Reflow 142.75,81.25 r0 top value=100nF (schematic designator C46)
C46_LOADsense "CAP 0603 100nF X7R" WCAP-CSGP_0603_L1.6W0.8H0.8_Reflow 131.75,81.25 r0 top value=100nF (schematic designator C46)
C47_BATsense "CAP 0603 1nF X7R" WCAP-CSGP_0603_L1.6W0.8H0.8_Reflow 142.75,79.75 r180 top value=1nF (schematic designator C47)
C47_LOADsense "CAP 0603 1nF X7R" WCAP-CSGP_0603_L1.6W0.8H0.8_Reflow 131.75,79.75 r180 top value=1nF (schematic designator C47)
C48_BATsense "CAP 0603 1uF X7R" WCAP-CSGP_0603_L1.6W0.8H0.8_Reflow 133.25,96.25 r180 top value=1uF (schematic designator C48)
C48_LOADsense "CAP 0603 1uF X7R" WCAP-CSGP_0603_L1.6W0.8H0.8_Reflow 144.25,96.25 r180 top value=1uF (schematic designator C48)
C49_BATsense "CAP 0603 1nF X7R" WCAP-CSGP_0603_L1.6W0.8H0.8_Reflow 144.25,94.75 r180 top value=1nF (schematic designator C49)
C49_LOADsense "CAP 0603 1nF X7R" WCAP-CSGP_0603_L1.6W0.8H0.8_Reflow 133.25,94.75 r180 top value=1nF (schematic designator C49)
C50_BATsense "CAP 0603 1nF X7R" WCAP-CSGP_0603_L1.6W0.8H0.8_Reflow 138,80.5 r90 top value=1nF (schematic designator C50)
C50_LOADsense "CAP 0603 1nF X7R" WCAP-CSGP_0603_L1.6W0.8H0.8_Reflow 127,80.5 r90 top value=1nF (schematic designator C50)
C51_BATsense "CAP 0603 1uF X7R" WCAP-CSGP_0603_L1.6W0.8H0.8_Reflow 139.25,80.5 r90 top value=1uF (schematic designator C51)
C51_LOADsense "CAP 0603 1uF X7R" WCAP-CSGP_0603_L1.6W0.8H0.8_Reflow 128.25,80.5 r90 top value=1uF (schematic designator C51)
C52_BATsense "CAP 0603 100nF X7R" WCAP-CSGP_0603_L1.6W0.8H0.8_Reflow 140.5,80.5 r270 top value=100nF (schematic designator C52)
C52_LOADsense "CAP 0603 100nF X7R" WCAP-CSGP_0603_L1.6W0.8H0.8_Reflow 129.5,80.5 r270 top value=100nF (schematic designator C52)
C53_BATsense "CAP 0603 100nF X7R" WCAP-CSGP_0603_L1.6W0.8H0.8_Reflow 139.25,94.75 r0 top value=100nF (schematic designator C53)
C53_LOADsense "CAP 0603 100nF X7R" WCAP-CSGP_0603_L1.6W0.8H0.8_Reflow 128.25,94.75 r0 top value=100nF (schematic designator C53)
C54 "CAP 1206 10uF X7R" WCAP-CSGP_1206_L3.2W1.6H1.15 45,67.25 r90 top value=10uF
C55 "CAP 0402 100nF X7R" WCAP-CSGP_0402_L1W0.5H0.5 45,70 r0 top value=100nF
C56 "CAP 0603 2.2uF X7R" WCAP-CSGP_0603_L1.6W0.8H0.8_Reflow 20.75,90.25 r180 top value=2.2uF
C57 "CAP 0603 2.2uF X7R" WCAP-CSGP_0603_L1.6W0.8H0.8_Reflow 13.25,90.25 r0 top value=2.2uF
C58 "CAP 1206 1nF X7R" WCAP-CSGP_1206_L3.2W1.6H1.15 23.25,97 r270 top value=1nF
C59 "CAP 0402 100nF X7R" WCAP-CSGP_0402_L1W0.5H0.5 43,84.75 r180 top value=100nF
C60 "CAP 0402 100nF X7R" WCAP-CSGP_0402_L1W0.5H0.5 33,84.5 r0 top value=100nF
C61 "CAP 0402 1uF X7R" WCAP-CSGP_0402_L1W0.5H0.5 45.5,71.5 r90 top value=1uF
C62_AuxRelay "VEJ101M1ETR-0607" CAPAE660X800N 33,42 r0 top value=100uF (schematic designator C62)
C62_ContactorDriver "VEJ101M1ETR-0607" CAPAE660X800N 15,79.75 r0 top value=100uF (schematic designator C62)
C63 "CAP 1206 1nF X7R" WCAP-CSGP_1206_L3.2W1.6H1.15 56.25,72.75 r180 top value=1nF
C68_AuxRelay "CAP 0402 100nF X7R" WCAP-CSGP_0402_L1W0.5H0.5 27,45.75 r0 top value=100nF (schematic designator C68)
C68_ContactorDriver "CAP 0402 100nF X7R" WCAP-CSGP_0402_L1W0.5H0.5 9.5,79.25 r90 top value=100nF (schematic designator C68)
C69_BATsense "CAP 0402 4.7nF X7R" WCAP-CSGP_0402_L1W0.5H0.5 57.75,77 r270 top value=4.7nF (schematic designator C69)
C69_LOADsense "CAP 0402 4.7nF X7R" WCAP-CSGP_0402_L1W0.5H0.5 58.25,79.5 r0 top value=4.7nF (schematic designator C69)
C70_BATsense "CAP 0402 220nF X7R" WCAP-CSGP_0402_L1W0.5H0.5 59.75,78 r270 top value=220nF (schematic designator C70)
C70_LOADsense "CAP 0402 220nF X7R" WCAP-CSGP_0402_L1W0.5H0.5 59.75,80 r270 top value=220nF (schematic designator C70)
C71_BATsense "CAP 0402 4.7nF X7R" WCAP-CSGP_0402_L1W0.5H0.5 58.25,78.5 r180 top value=4.7nF (schematic designator C71)
C71_LOADsense "CAP 0402 4.7nF X7R" WCAP-CSGP_0402_L1W0.5H0.5 57.75,81 r270 top value=4.7nF (schematic designator C71)
D1 "USBLC6-2SC6" ST_SOT23-6L 79,89 r90 top
D2 "PESD5V0V1BB,115" PESD5V0V1BB115 21.5,26 r0 top
D3 "PESD5V0V1BB,115" PESD5V0V1BB115 15,26 r0 top
D4 "1N4148WS" FP-477AB-IPC_C 101,70.75 r180 top
D5 "USBLC6-2SC6" ST_SOT23-6L 17,89 r90 top
D6_AuxRelay "SS34-E3/9AT" FP-SMC-MFG 23.25,42 r180 top (schematic designator D6)
D6_ContactorDriver "SS34-E3/9AT" FP-SMC-MFG 13.25,71 r270 top (schematic designator D6)
FB1 "BLM18PG121SN1D" FP-BLM18-0_15-t0_8-IPC_A 79,76.25 r270 top
IC1 "STM32G491CET6" QFP50P900X900X160-48N 67,82.25 r0 top locked
IC3 "TPS2116DRLR" SOTFL50P160X60-8N 88.85,82.45 r0 top
IC4 "TPS2116DRLR" SOTFL50P160X60-8N 26.4,2.3 r180 top
IC5 "MC33664ATL1EG" SOIC127P600X175-16N 61.25,62.75 r270 top
IC6 "TCAN3404DDFRQ1" TSOT-23-8 51.3,59.35 r270 top
IC7 "SP3485EN-L_TR" SOIC127P600X175-8N 18.5,62.75 r270 top
IC8 "ESP32-C3-WROOM-02U-N4" ESP32C3WROOM02UN4 33.36,75.65 r180 top locked
IC9 "TCAN3404DDFRQ1" TSOT-23-8 47.8,59.35 r270 top
J1 "TYPE-C 16PIN 2MD(073)" 629722000214 79,96 r180 top locked
J2 "RJ-804-1-6" RJ80416 12,32.5 r270 top
J3 "RJ-804-1-6" RJ80416 12,14 r270 top
J4 "DB125-3.81-2P" SHDR2W80P0X381_1X2_802X740X880P 5,78.81 r270 top
J5 "DB125-3.81-2P" SHDR2W80P0X381_1X2_802X740X880P 5,69.81 r270 top
J6 "HB9500M-9.5-3P" HB9500M953P 124.5,44 r0 top
J7 "DB125-3.81-2P" SHDR2W80P0X381_1X2_802X740X880P 47,95 r180 top
J8 "DB125-3.81-2P" SHDR2W80P0X381_1X2_802X740X880P 5,87.81 r270 top
J9 "DB125-3.81-2P" SHDR2W80P0X381_1X2_802X740X880P 5,96.81 r270 top
J10 "RJ-804-1-6" RJ80416 12,51 r270 top
J11 "FTSH-107-01-L-DV-K" FP-FTSH-107-01-L-DV-K-MFG 67,96 r180 top
J12 "DB125-3.81-2P" SHDR2W80P0X381_1X2_802X740X880P 56.81,95 r180 top
J13 "TYPE-C 16PIN 2MD(073)" 629722000214 17,96 r180 top locked
K1 "G5Q-1A4-DC5" FP-G5Q-1A4-DC5-MFG 29.25,56.5 r90 top
LED1 "KT-0805W" KT0805G 117,97.5 r90 top
LED2 "KT-0805G" KT0805G 102.75,97.5 r90 top
LED3 "KT-0805W" KT0805G 122,20 r90 top
LED4 "KT-0805G" KT0805G 122,28.5 r90 top
LED7 "NCD0805R1" KT0805G 34.75,97 r0 top
LED8 "KT-0805Y" KT0805G 30.5,97 r0 top
LED9 "KT-0805G" KT0805G 26.25,97 r0 top
LED10 "KT-0805Y" KT0805G 41.25,65.75 r270 top
P1 "61300211121" 61300211121 76.25,76.5 r270 top
PS1 "K7805-500R3" K7805500R3 94,85 r270 top
PS2 "XC6206P332MR-G" SOT95P280X130-3N 85.9,86 r0 top
PS3 "WRB1203S-3WR2" WRB1203S3WR2 33.75,35.66 r270 top
PS4 "TLV75733PDBVR" FP-DBV0005A-MFG 9.175,5.275 r0 top
PS5 "DDRH-15-12P" DDRH1512P 111,6 r180 top locked
Q1 "AO3400A" FP-SOT23-MFG 100.75,73.5 r270 top
Q2_AuxRelay "AO3400A" FP-SOT23-MFG 21.75,47.25 r270 top (schematic designator Q2)
Q2_ContactorDriver "AO3400A" FP-SOT23-MFG 18.75,73.5 r270 top (schematic designator Q2)
R1 "RES 0402 120R 1%" FP0402 59.5,82 r180 top value=120R
R2 "RES 0402 33kR 1%" FP0402 75.5,89.25 r180 top value=33kR
R3 "RES 0402 5.1kR 1%" FP0402 84.75,94 r90 top value=5.1kR
R4 "RES 0603 82kR 1%" RES_SM0603_YAGEORC_N 75.25,88 r180 top value=82kR
R5 "RES 0402 5.1kR 1%" FP0402 73.25,94 r90 top value=5.1kR
R6 "RES 1206 1M 1%" RES_SM1206_YAGEORC_N 86.5,98.25 r180 top value=1M
R7 "RES 0402 12kR 1%" FP0402 96.25,91 r90 top value=12kR
R8 "RES 0402 12kR 1%" FP0402 99,96 r0 top value=12kR
R9 "RES 1206 DNP 1%" RES_SM1206_YAGEORC_N 35.5,3.25 r90 top value=DNP
R10 "RES 0402 100kR 1%" FP0402 86.5,82 r90 top value=100kR
R11 "RES 0603 82kR 1%" RES_SM0603_YAGEORC_N 22,84 r0 top value=82kR
R12 "RES 0402 33kR 1%" FP0402 85.5,82 r270 top value=33kR
R13 "RES 0402 100kR 1%" FP0402 28.25,2.5 r270 top value=100kR
R14 "RES 0402 51kR 1%" FP0402 29.25,2.5 r90 top value=51kR
R15 "RES 0402 4.7kR 1%" FP0402 30.25,2.5 r90 top value=4.7kR
R16 "RES 0603 120kR 1%" RES_SM0603_YAGEORC_N 25,84 r0 top value=120kR
R17 "RES 0603 12kR 1%" RES_SM0603_YAGEORC_N 117,18.25 r180 top value=12kR
R18 "RES 0603 12kR 1%" RES_SM0603_YAGEORC_N 117,26.75 r180 top value=12kR
R22 "RES 0402 5.1kR 1%" FP0402 56.75,67.75 r90 top value=5.1kR
R23 "RES 0402 5.1kR 1%" FP0402 59.25,67.75 r90 top value=5.1kR
R24 "RES 0603 75R 1%" RES_SM0603_YAGEORC_N 62,56.75 r0 top value=75R
R25 "RES 0603 75R 1%" RES_SM0603_YAGEORC_N 61,58.25 r0 top value=75R
R26 "RES 0402 5.1kR 1%" FP0402 61.75,67.75 r270 top value=5.1kR
R27 "RES 0603 120R 1%" RES_SM0603_YAGEORC_N 44,56 r270 top value=120R
R28 "RES 0603 120R 1%" RES_SM0603_YAGEORC_N 42.5,56 r270 top value=120R
R29 "RES 0603 120R 1%" RES_SM0603_YAGEORC_N 39.5,57 r270 top value=120R
R30 "RES 0603 120R 1%" RES_SM0603_YAGEORC_N 41,57 r270 top value=120R
R31 "RES 0603 390R 1%" RES_SM0603_YAGEORC_N 20.25,55 r180 top value=390R
R32 "RES 0603 120R 1%" RES_SM0603_YAGEORC_N 18.5,58.25 r180 top value=120R
R33 "RES 0603 390R 1%" RES_SM0603_YAGEORC_N 15.5,58.25 r180 top value=390R
R34 "RES 0603 330R 1%" RES_SM0603_YAGEORC_N 38,95.75 r180 top value=330R
R35 "RES 0603 330R 1%" RES_SM0603_YAGEORC_N 38,97.25 r180 top value=330R
R36 "RES 0603 330R 1%" RES_SM0603_YAGEORC_N 38,98.75 r180 top value=330R
R37 "RES 1206 DNP 1%" RES_SM1206_YAGEORC_N 16.25,40 r180 top value=DNP
R38 "RES 1206 DNP 1%" RES_SM1206_YAGEORC_N 16.25,32 r180 top value=DNP
R39 "RES 1206 DNP 1%" RES_SM1206_YAGEORC_N 16.25,52.75 r180 top value=DNP
R40 "RES 1206 0R 1%" RES_SM1206_YAGEORC_N 16.25,46 r180 top value=0R
R41 "RES 1206 0R 1%" RES_SM1206_YAGEORC_N 16.25,50.5 r180 top value=0R
R42 "RES 1206 DNP 1%" RES_SM1206_YAGEORC_N 16.25,48.25 r180 top value=DNP
R43 "RES 0603 22R 1%" RES_SM0603_YAGEORC_N 97.5,74.25 r180 top value=22R
R44 "RES 0603 47kR 1%" RES_SM0603_YAGEORC_N 97.5,72.75 r0 top value=47kR
R45_BATsense "RES 0402 12kR 1%" FP0402 56.25,77.5 r0 top value=12kR (schematic designator R45)
R45_LOADsense "RES 0402 12kR 1%" FP0402 56.25,79.5 r0 top value=12kR (schematic designator R45)
R46_BATsense "RES 0402 12kR 1%" FP0402 56.25,78.5 r0 top value=12kR (schematic designator R46)
R46_LOADsense "RES 0402 12kR 1%" FP0402 56.25,80.5 r0 top value=12kR (schematic designator R46)
R47_BATsense "RES 1206 1M 1%" RES_SM1206_YAGEORC_N 125.25,56.5 r0 top value=1M (schematic designator R47)
R47_LOADsense "RES 1206 1M 1%" RES_SM1206_YAGEORC_N 118,64 r0 top value=1M (schematic designator R47)
R48_BATsense "RES 1206 1M 1%" RES_SM1206_YAGEORC_N 123.25,53 r90 top value=1M (schematic designator R48)
R48_LOADsense "RES 1206 1M 1%" RES_SM1206_YAGEORC_N 114.75,62 r90 top value=1M (schematic designator R48)
R49_BATsense "RES 1206 1M 1%" RES_SM1206_YAGEORC_N 128.75,58.198 r270 top value=1M (schematic designator R49)
R49_LOADsense "RES 1206 1M 1%" RES_SM1206_YAGEORC_N 120.25,67.5 r270 top value=1M (schematic designator R49)
R50_BATsense "RES 1206 1M 1%" RES_SM1206_YAGEORC_N 128.75,62.948 r270 top value=1M (schematic designator R50)
R50_LOADsense "RES 1206 1M 1%" RES_SM1206_YAGEORC_N 116.75,69.5 r0 top value=1M (schematic designator R50)
R51_BATsense "RES 1206 1M 1%" RES_SM1206_YAGEORC_N 133.75,72.25 r0 top value=1M (schematic designator R51)
R51_LOADsense "RES 1206 1M 1%" RES_SM1206_YAGEORC_N 116.75,76.5 r0 top value=1M (schematic designator R51)
R52_BATsense "RES 1206 1M 1%" RES_SM1206_YAGEORC_N 128.75,67.698 r90 top value=1M (schematic designator R52)
R52_LOADsense "RES 1206 1M 1%" RES_SM1206_YAGEORC_N 114.75,73 r90 top value=1M (schematic designator R52)
R53_BATsense "RES 1206 1M 1%" RES_SM1206_YAGEORC_N 138.5,72.75 r180 top value=1M (schematic designator R53)
R53_LOADsense "RES 1206 1M 1%" RES_SM1206_YAGEORC_N 121.5,76.5 r180 top value=1M (schematic designator R53)
R54_BATsense "RES 1206 1M 1%" RES_SM1206_YAGEORC_N 143.25,72.75 r180 top value=1M (schematic designator R54)
R54_LOADsense "RES 1206 1M 1%" RES_SM1206_YAGEORC_N 126.25,76.5 r180 top value=1M (schematic designator R54)
R55_BATsense "RES 0805 10kR 1%" RES_SM0805_YAGEORC_N 146,79.5 r180 top value=10kR (schematic designator R55)
R55_LOADsense "RES 0805 10kR 1%" RES_SM0805_YAGEORC_N 135,79.5 r180 top value=10kR (schematic designator R55)
R56_BATsense "RES 0603 47kR 1%" RES_SM0603_YAGEORC_N 139.25,96.25 r0 top value=47kR (schematic designator R56)
R56_LOADsense "RES 0603 47kR 1%" RES_SM0603_YAGEORC_N 128.25,96.25 r0 top value=47kR (schematic designator R56)
R57 "RES 0603 330R 1%" RES_SM0603_YAGEORC_N 37.25,65.75 r180 top value=330R
R58 "RES 0402 12kR 1%" FP0402 33.5,86 r270 top value=12kR
R59 "RES 0402 12kR 1%" FP0402 45,81.25 r0 top value=12kR
R60 "RES 0402 5.1kR 1%" FP0402 22.75,93.75 r90 top value=5.1kR
R61 "RES 0402 0R 1%" FP0402 17.5,85.75 r270 top value=0R
R62 "RES 0402 5.1kR 1%" FP0402 11.25,93.75 r90 top value=5.1kR
R63 "RES 0402 0R 1%" FP0402 16.5,85.75 r270 top value=0R
R64 "RES 1206 1M 1%" RES_SM1206_YAGEORC_N 10.75,97 r90 top value=1M
R65 "RES 0402 12kR 1%" FP0402 44.5,71.5 r270 top value=12kR
R66 "RES 0402 12kR 1%" FP0402 45,82.25 r0 top value=12kR
R67_AuxRelay "RES 0603 22R 1%" RES_SM0603_YAGEORC_N 22.75,50.5 r90 top value=22R (schematic designator R67)
R67_ContactorDriver "RES 0603 22R 1%" RES_SM0603_YAGEORC_N 20.5,77.173 r90 top value=22R (schematic designator R67)
R68_AuxRelay "RES 0603 47kR 1%" RES_SM0603_YAGEORC_N 20.75,50.5 r270 top value=47kR (schematic designator R68)
R68_ContactorDriver "RES 0603 47kR 1%" RES_SM0603_YAGEORC_N 21.5,73.75 r90 top value=47kR (schematic designator R68)
R69 "RES 1206 1M 1%" RES_SM1206_YAGEORC_N 56.25,75 r0 top value=1M
RD1 "HVR1A05-THT" HVR1A05-THT 102,62 r90 top
RT1 "PTCEL67R501TBE" PTCEL67R501TBE-Footprint-1 139.313,55 r180 top value=500
RT2 "PTCEL67R501TBE" PTCEL67R501TBE-Footprint-1 139.821,64.75 r0 top value=500
S1 "TS-1088-AR02016" TS1088AR02016 52,81.5 r90 top
S2 "TS-1088-AR02016" TS1088AR02016 46.5,76.25 r270 top
S3 "TS-1088-AR02016" TS1088AR02016 46.5,86.25 r270 top
T1 "HM2103NL" FP-HM2103NL-MFG 18.25,20 r0 top
TP1 "GTT_ProbeerPunt" GTT_ProbeerPuntFP 18.5,34.75 r0 top
TP2 "GTT_ProbeerPunt" GTT_ProbeerPuntFP 87.5,91.25 r0 top
TP3 "GTT_ProbeerPunt" GTT_ProbeerPuntFP 82.5,75.25 r0 top
TP4 "GTT_ProbeerPunt" GTT_ProbeerPuntFP 82.5,79.25 r0 top
TP5 "GTT_ProbeerPunt" GTT_ProbeerPuntFP 33,5.25 r0 top
TP6 "GTT_ProbeerPunt" GTT_ProbeerPuntFP 23.75,6.25 r0 top
TP8 "GTT_ProbeerPunt" GTT_ProbeerPuntFP 21,87.75 r0 top
TP9 "GTT_ProbeerPunt" GTT_ProbeerPuntFP 18.594,29.25 r0 top
TP10 "GTT_ProbeerPunt" GTT_ProbeerPuntFP 2.65,2.6 r90 top
U1 "CR2032-BS-6-1" CR2032BS61 83.75,64 r90 top
U3 "ISO7721DR" FP-D0008B-MFG 51.25,68 r270 top
U4 "ISO7721DR" FP-D0008B-MFG 37.75,86.75 r180 top
Y1 "Q13FC13500004" Q13FC1350000400 61.25,88.25 r0 top
Y2 "X322516MLB4SI" X322516MLB4SI 57.698,84.242 r0 top

## Footprints (in the part's own frame and the unit in brackets; to place one, negate y for a bottom-side part, rotate by r counter-clockwise, add the part's x,y. Pads: shape width x height; smd on the part's side, far side on the other; paste and mask are expansions set on the pad)
61300211121 [mm] "Pin Header, pitch 2.54 mm, THT, Vertical, single row, 2p"
  rrect50% 1.6x1.6 hole 1.1: 1(-1.27,0)
  round 1.6 hole 1.1: 2(1.27,0)
  silkscreen extent -2.69,-1.35 2.69,1.35, body extent -2.54,-1.27 2.54,1.27, height 8.57
629722000214 [mm] "USB TYPE C VERTICAL PLUG"
  rect 0.6x1.14 smd: A1/B12(-3.2,3.605) A4/B9(-2.4,3.605) A9/B4(2.4,3.605) A12/B1(3.2,3.605)
  rect 0.3x1.14 smd: A5(-1.25,3.605) A6(-0.25,3.605) A7(0.25,3.605) A8(1.25,3.605) B5(1.75,3.605) B6(0.75,3.605) B7(-0.75,3.605) B8(-1.75,3.605)
  round 0.65 hole 0.65 unplated mask+0: MH1(-2.89,2.535) MH2(2.89,2.535)
  oval 1x2.1 hole 0.6 slot 1.7 at 90 deg: Shell(-4.32,3.035) Shell(4.32,3.035)
  oval 1x1.8 hole 0.6 slot 1.4 at 90 deg: Shell(-4.32,-1.145) Shell(4.32,-1.145)
  silkscreen extent -4.47,-3.4 4.47,1.7, body extent -4.79,-3.76 4.79,3.95, height 3.33
CAPAE660X800N [mm]
  rect 3.5x1.2 smd: 1(-2.67,0) 2(2.67,0)
  silkscreen extent -4.43,-3.3 3.3,3.3, body extent -3.7,-3.4 3.7,3.4, height 8
CR2032BS61 [mm]
  rect 4.2x3 smd: 1(0,14.5) 2(0,-14.5)
  silkscreen extent -8,-14.25 8,16.6, body extent -8,-15.65 8,15.65, height 5.5
DDRH1512P [mm]
  rect 2.1x2.1 hole 1.4: 1(0,0)
  round 2.1 hole 1.4: 2(0,-44.45) 3(69.85,-44.45) 4(69.85,-12.7) 5(69.85,0)
  silkscreen extent -3.8,-47.62 73.03,3.18, body extent -3.18,-47.62 73.03,3.18, height 25.13
ESP32C3WROOM02UN4 [mm]
  rect 1.5x0.9 smd: 1(-8.75,5.75) 2(-8.75,4.25) 3(-8.75,2.75) 4(-8.75,1.25) 5(-8.75,-0.25) 6(-8.75,-1.75) 7(-8.75,-3.25) 8(-8.75,-4.75) 9(-8.75,-6.25) 10(8.75,-6.25) 11(8.75,-4.75) 12(8.75,-3.25) 13(8.75,-1.75) 14(8.75,-0.25) 15(8.75,1.25) 16(8.75,2.75) 17(8.75,4.25) 18(8.75,5.75)
  rect 0.7x0.7 smd: 19(0.96,-0.45) 20(0.96,0.65) 21(-0.14,0.65) 22(-0.14,-0.45) 23(-0.14,-1.55) 24(0.96,-1.55) 25(2.06,-1.55) 26(2.06,-0.45) 27(2.06,0.65)
  silkscreen extent -10,-7.15 9,7.15, body extent -9.01,-7.15 9.02,7.15, height 3.26
FP0402 [mm]
  rect 0.5x0.6 smd: 1(-0.5,0) 2(0.5,0)
  body extent -0.85,-0.4 0.85,0.4, height 0.25
FP-477AB-IPC_C [mm]
  rect 1.006x0.392 smd paste+0 mask+0: 1(-1,0)
  rrect100% 1.006x0.392 smd paste+0 mask+0: 2(1,0)
  silkscreen extent -1.46,-0.65 0.85,0.82, body extent -1.6,-0.73 1.6,0.73, height 0.25
FP-BLM18-0_15-t0_8-IPC_A [mm]
  rect 1.306x1.058 smd paste+0 mask+0: 1(-0.776,0) 2(0.776,0)
  silkscreen extent -1.43,-0.93 1.43,0.93, body extent -1.93,-1.03 1.93,1.03, height 0.25
FP-D0008B-MFG [mm]
  rrect17% 1.4x0.6 smd paste+0 mask+0: 1(-2.75,1.905) 2(-2.75,0.635) 3(-2.75,-0.635) 4(-2.75,-1.905) 5(2.75,-1.905) 6(2.75,-0.635) 7(2.75,0.635) 8(2.75,1.905)
  silkscreen extent -4.14,-2.5 1.5,2.5, body extent -3.55,-2.75 3.55,2.75, height 0.25
FP-DBV0005A-MFG [mm]
  rrect17% 1.1x0.6 smd paste+0 mask+0: 1(-1.3,0.95) 2(-1.3,0) 3(-1.3,-0.95) 4(1.3,-0.95) 5(1.3,0.95)
  silkscreen extent -2.87,-1.53 0.87,2.37, body extent -1.95,-1.78 1.95,1.78, height 0.25
FP-FTSH-107-01-L-DV-K-MFG [mm]
  rect 0.74x2.79 smd paste+0 mask+0: 1(-3.81,-2.035) 2(-3.81,2.035) 3(-2.54,-2.035) 4(-2.54,2.035) 5(-1.27,-2.035) 6(-1.27,2.035) 7(0,-2.035) 8(0,2.035) 9(1.27,-2.035) 10(1.27,2.035) 11(2.54,-2.035) 12(2.54,2.035) 13(3.81,-2.035) 14(3.81,2.035)
  silkscreen extent -4.87,-3.62 4.51,0.27, body extent -4.61,-3.53 4.61,3.53, height 0.25
FP-G5Q-1A4-DC5-MFG [mm]
  rect 2x2 hole 1.3 paste-2539.97 mask+0: 1(-8.82,-3.81)
  round 2 hole 1.3 paste-2539.97 mask+0: 2(1.34,-3.81) 3(8.96,-3.81) 5(-8.82,3.81)
  silkscreen extent -10.87,-5.15 10.15,5.15, body extent -10.25,-5.25 10.25,5.25, height 0.25
FP-HM2103NL-MFG [mm]
  rect 0.76x1.27 smd: 1(-2.54,-4.19) 2(0,-4.19) 3(2.54,-4.19) 4(2.54,4.19) 5(0,4.19) 6(-2.54,4.19)
  silkscreen extent -4.07,-4.58 4.07,3.62, body extent -4.17,-4.92 4.17,4.92, height 0.25
FP-SMC-MFG [mm]
  rect 1.72x3.2 smd paste+0 mask+0: 1(-3.205,0) 2(3.205,0)
  silkscreen extent -4.75,-3.11 3.55,3.11, body extent -4.17,-3.21 4.17,3.21, height 0.25
FP-SOT23-MFG [mm]
  rect 0.8x0.8 smd paste+0 mask+0: 1(-1.2,0.95) 2(-1.2,-0.95) 3(1.2,0)
  silkscreen extent -0.9,-1.55 0.9,1.55, body extent -1.7,-1.78 1.7,1.78, height 0.25
GTT_ProbeerPuntFP [mm]
  rrect50% 2x2 hole 1: 1(0,0)
HB9500M953P [mm]
  round 2.883 hole 1.92: 1(0,0) 2(9.5,0) 3(19,0)
  silkscreen extent -5.5,-12.05 24.5,3.95, body extent -5.5,-12.05 24.5,3.95, height 13.3
HVR1A05-THT [mm]
  round 1.4 hole 0.85: 1(-3.82,-12.7) 2(24.12,-12.7) 3(20.3,0) 4(0,0)
  body extent -6,-13 26.25,0.3, height 8.8
K7805500R3 [mm]
  round 1.5 hole 1: 1(0,0) 2(2.54,0) 3(5.08,0)
  silkscreen extent -3.7,-2.15 8.34,5.4, body extent -3.26,-2.15 8.34,5.4, height 10.51
KT0805G [mm]
  rect 1.4x1 smd: 1(0,-0.95) 2(0,0.95)
  silkscreen extent -0.25,-2.25 0.25,2
PESD5V0V1BB115 [mm]
  rect 0.5x0.6 smd: 1(-0.7,0) 2(0.7,0)
  silkscreen extent -1.5,-0.05 -1.4,0.05, body extent -0.8,-0.42 0.8,0.41, height 0.61
PTCEL67R501TBE-Footprint-1 [mm]
  rect 1.5x1.5 hole 1: 1(-3.937,0)
  round 1.5 hole 1: 2(3.429,0)
  silkscreen extent -9.49,-3.75 8.21,3.75, body extent -8.5,-3.75 8,3.75, height 20.74
Q13FC1350000400 [mm]
  rect 1x1.8 smd: 1(-1.25,0) 2(1.25,0)
  silkscreen extent -2.25,-0.75 0.4,0.75
QFP50P900X900X160-48N [mm]
  rect 1.475x0.3 smd: 1(-4.238,2.75) 2(-4.238,2.25) 3(-4.238,1.75) 4(-4.238,1.25) 5(-4.238,0.75) 6(-4.238,0.25) 7(-4.238,-0.25) 8(-4.238,-0.75) 9(-4.238,-1.25) 10(-4.238,-1.75) 11(-4.238,-2.25) 12(-4.238,-2.75) 25(4.238,-2.75) 26(4.238,-2.25) 27(4.238,-1.75) 28(4.238,-1.25) 29(4.238,-0.75) 30(4.238,-0.25) 31(4.238,0.25) 32(4.238,0.75) 33(4.238,1.25) 34(4.238,1.75) 35(4.238,2.25) 36(4.238,2.75)
  rect 0.3x1.475 smd: 13(-2.75,-4.238) 14(-2.25,-4.238) 15(-1.75,-4.238) 16(-1.25,-4.238) 17(-0.75,-4.238) 18(-0.25,-4.238) 19(0.25,-4.238) 20(0.75,-4.238) 21(1.25,-4.238) 22(1.75,-4.238) 23(2.25,-4.238) 24(2.75,-4.238) 37(2.75,4.238) 38(2.25,4.238) 39(1.75,4.238) 40(1.25,4.238) 41(0.75,4.238) 42(0.25,4.238) 43(-0.25,4.238) 44(-0.75,4.238) 45(-1.25,4.238) 46(-1.75,4.238) 47(-2.25,4.238) 48(-2.75,4.238)
  silkscreen extent -4.85,-3.15 3.15,3.62, body extent -4.5,-4.5 4.5,4.5, height 1.6
RES_SM0603_YAGEORC_N [mm] "Resistor, Yageo RC_L, SM0603, IPC Medium Density"
  rect 0.7x0.9 smd: 1(-0.827,0) 2(0.827,0)
  body extent -0.85,-0.45 0.85,0.45, height 0.55
RES_SM0805_YAGEORC_N [mm] "Resistor, Yageo RC_L, SM0805, IPC Medium Density"
  rect 1x1.35 smd: 1(-1.027,0) 2(1.027,0)
  body extent -1.05,-0.67 1.05,0.67, height 0.6
RES_SM1206_YAGEORC_N [mm] "Resistor, Yageo RC_L, SM1206, IPC Medium Density"
  rect 1.05x1.7 smd: 1(-1.552,0) 2(1.552,0)
  body extent -1.6,-0.85 1.6,0.85, height 0.65
RJ80416 [mm]
  rect 1.5x1.5 hole 1: 1(0,0)
  round 1.5 hole 1: 2(-1.02,-2.54) 3(-2.04,0) 4(-3.06,-2.54) 5(-4.08,0) 6(-5.1,-2.54) 7(-6.12,0) 8(-7.14,-2.54)
  round 1.65 hole 3.3 unplated: 9(-9.65,-6) 10(2.51,-6)
  silkscreen extent -11.17,-11.3 4.03,1.3, body extent -11.2,-11.3 4.06,0.7, height 11.8
SHDR2W80P0X381_1X2_802X740X880P [mm]
  rect 2.025x2.025 hole 1.2: 1(0,0)
  round 2.025 hole 1.2: 2(3.81,0)
  silkscreen extent -2.3,-3 5.82,3.7, body extent -2.3,-4.05 5.82,3.7, height 8.6
SOIC127P600X175-8N [mm]
  rect 1.525x0.7 smd: 1(-2.712,1.905) 2(-2.712,0.635) 3(-2.712,-0.635) 4(-2.712,-1.905) 5(2.712,-1.905) 6(2.712,-0.635) 7(2.712,0.635) 8(2.712,1.905)
  silkscreen extent -3.47,-2.45 1.6,2.61, body extent -3,-2.45 3,2.45, height 1.75
SOIC127P600X175-16N [mm]
  rect 1.525x0.65 smd: 1(-2.712,4.445) 2(-2.712,3.175) 3(-2.712,1.905) 4(-2.712,0.635) 5(-2.712,-0.635) 6(-2.712,-1.905) 7(-2.712,-3.175) 8(-2.712,-4.445) 9(2.712,-4.445) 10(2.712,-3.175) 11(2.712,-1.905) 12(2.712,-0.635) 13(2.712,0.635) 14(2.712,1.905) 15(2.712,3.175) 16(2.712,4.445)
  silkscreen extent -3.47,-4.95 1.6,5.12, body extent -3,-4.95 3,4.95, height 1.75
SOIC127P1030X265-16N [mm]
  rect 1.95x0.65 smd: 1(-4.725,4.445) 2(-4.725,3.175) 3(-4.725,1.905) 4(-4.725,0.635) 5(-4.725,-0.635) 6(-4.725,-1.905) 7(-4.725,-3.175) 8(-4.725,-4.445) 9(4.725,-4.445) 10(4.725,-3.175) 11(4.725,-1.905) 12(4.725,-0.635) 13(4.725,0.635) 14(4.725,1.905) 15(4.725,3.175) 16(4.725,4.445)
  silkscreen extent -5.7,-5.15 3.4,5.15, body extent -5.17,-5.15 5.17,5.15, height 2.59
SOT95P280X130-3N [mm]
  rect 0.9x0.6 smd: 1(-1.4,0.95) 2(-1.4,-0.95) 3(1.4,0)
  silkscreen extent -1.85,-1.45 0.6,1.5, body extent -1.4,-1.45 1.4,1.45, height 1.3
SOTFL50P160X60-8N [mm]
  rect 0.67x0.3 smd: 1(-0.74,0.75) 2(-0.74,0.25) 3(-0.74,-0.25) 4(-0.74,-0.75) 5(0.74,-0.75) 6(0.74,-0.25) 7(0.74,0.25) 8(0.74,0.75)
  silkscreen extent -1.07,1.15 -0.6,1.15, body extent -0.8,-1.05 0.8,1.05, height 0.6
ST_SOT23-6L [mm] "SOT23, 6-Leads, Body 2.93x2.80mm, Pitch 0.95mm, IPC Medium Density"
  rect 1.2x0.6 smd: 1(-1.15,0.95) 2(-1.15,0) 3(-1.15,-0.95) 4(1.15,-0.95) 5(1.15,0) 6(1.15,0.95)
  silkscreen extent -2.1,-1.8 2.1,2.28, body extent -1.6,-1.53 1.6,1.53, height 1.45
TS1088AR02016 [mm]
  rect 1.35x1.8 smd: 1(-2.075,0) 2(2.075,0)
  silkscreen extent -3.3,-1.45 2,1.45, body extent -2.62,-1.45 2.62,1.45, height 2.1
TSOT-23-8 [mm] "SOT-23-THIN"
  rect 1.05x0.45 smd: 1(0,0) 2(0,-0.65) 3(0,-1.3) 4(0,-1.95) 5(2.6,-1.95) 6(2.6,-1.3) 7(2.6,-0.65) 8(2.6,0)
  silkscreen extent -0.76,0.7 0.76,0.7, body extent -0.2,-2.48 2.8,0.52, height 0.99
WCAP-CSGP_0402_L1W0.5H0.5 [mm] "Ceramic Capacitors, body 1x0.5mm"
  rect 0.5x0.5 smd: 1(-0.5,0) 2(0.5,0)
  body extent -0.5,-0.25 0.5,0.25, height 0.5
WCAP-CSGP_0603_L1.6W0.8H0.8_Reflow [mm] "Ceramic Capacitors, body 1.6x0.8mm"
  rect 0.8x0.8 smd: 1(-0.75,0) 2(0.75,0)
  body extent -0.8,-0.4 0.8,0.4, height 0.8
WCAP-CSGP_1206_L3.2W1.6H1.15 [mm] "Ceramic Capacitors, body 3.2x1.6mm"
  rect 0.9x1.6 smd: 1(-1.55,0) 2(1.55,0)
  silkscreen extent -0.8,-0.87 0.8,0.87, body extent -1.6,-0.8 1.6,0.8, height 1.15
WRB1203S3WR2 [mm]
  rect 1.5x1.5 hole 1: 1(0,0)
  round 1.5 hole 1: 2(2.54,0) 3(5.08,0) 5(10.16,0) 6(12.7,0) 7(15.24,0) 8(17.78,0)
  silkscreen extent -2.11,-7 19.89,3.2, body extent -2.11,-7 19.89,2.5, height 12.35
X322516MLB4SI [mm]
  rect 1.4x1.2 smd: 1(-1.1,-0.85) 2(1.1,-0.85) 3(1.1,0.85) 4(-1.1,0.85)
  silkscreen extent -1.9,-2.09 -1.7,-1.89, body extent -1.6,-1.25 1.6,1.25, height 0.7